# Allegro board XS6.brd
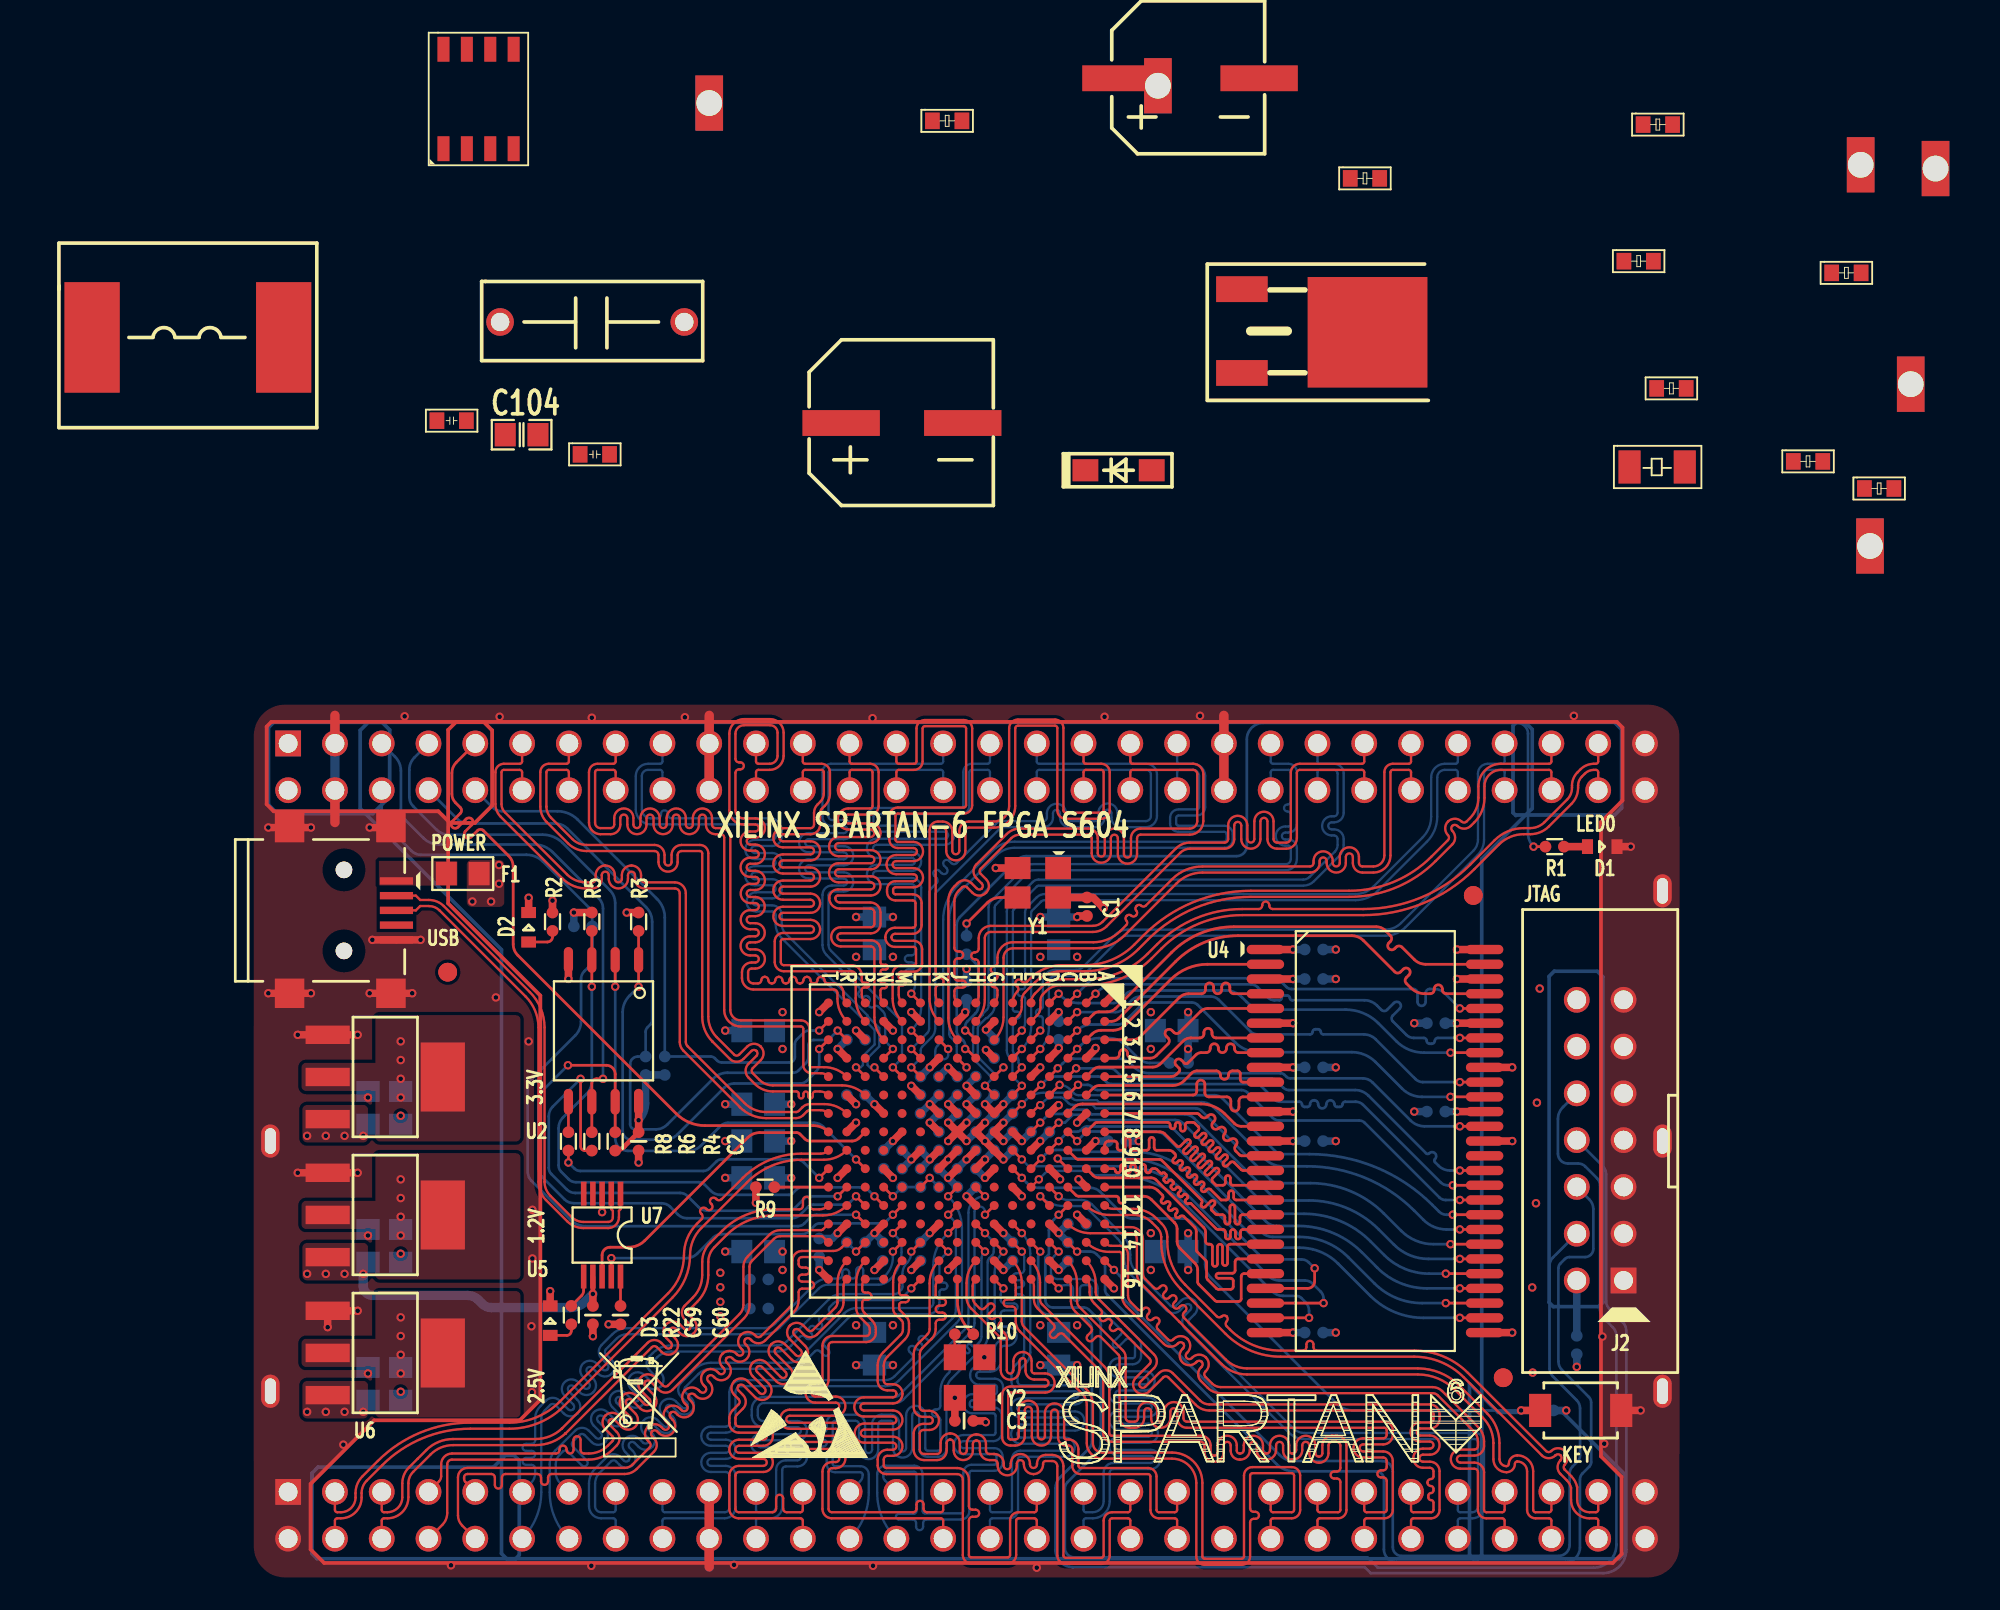
[diagram p0: board, top side]
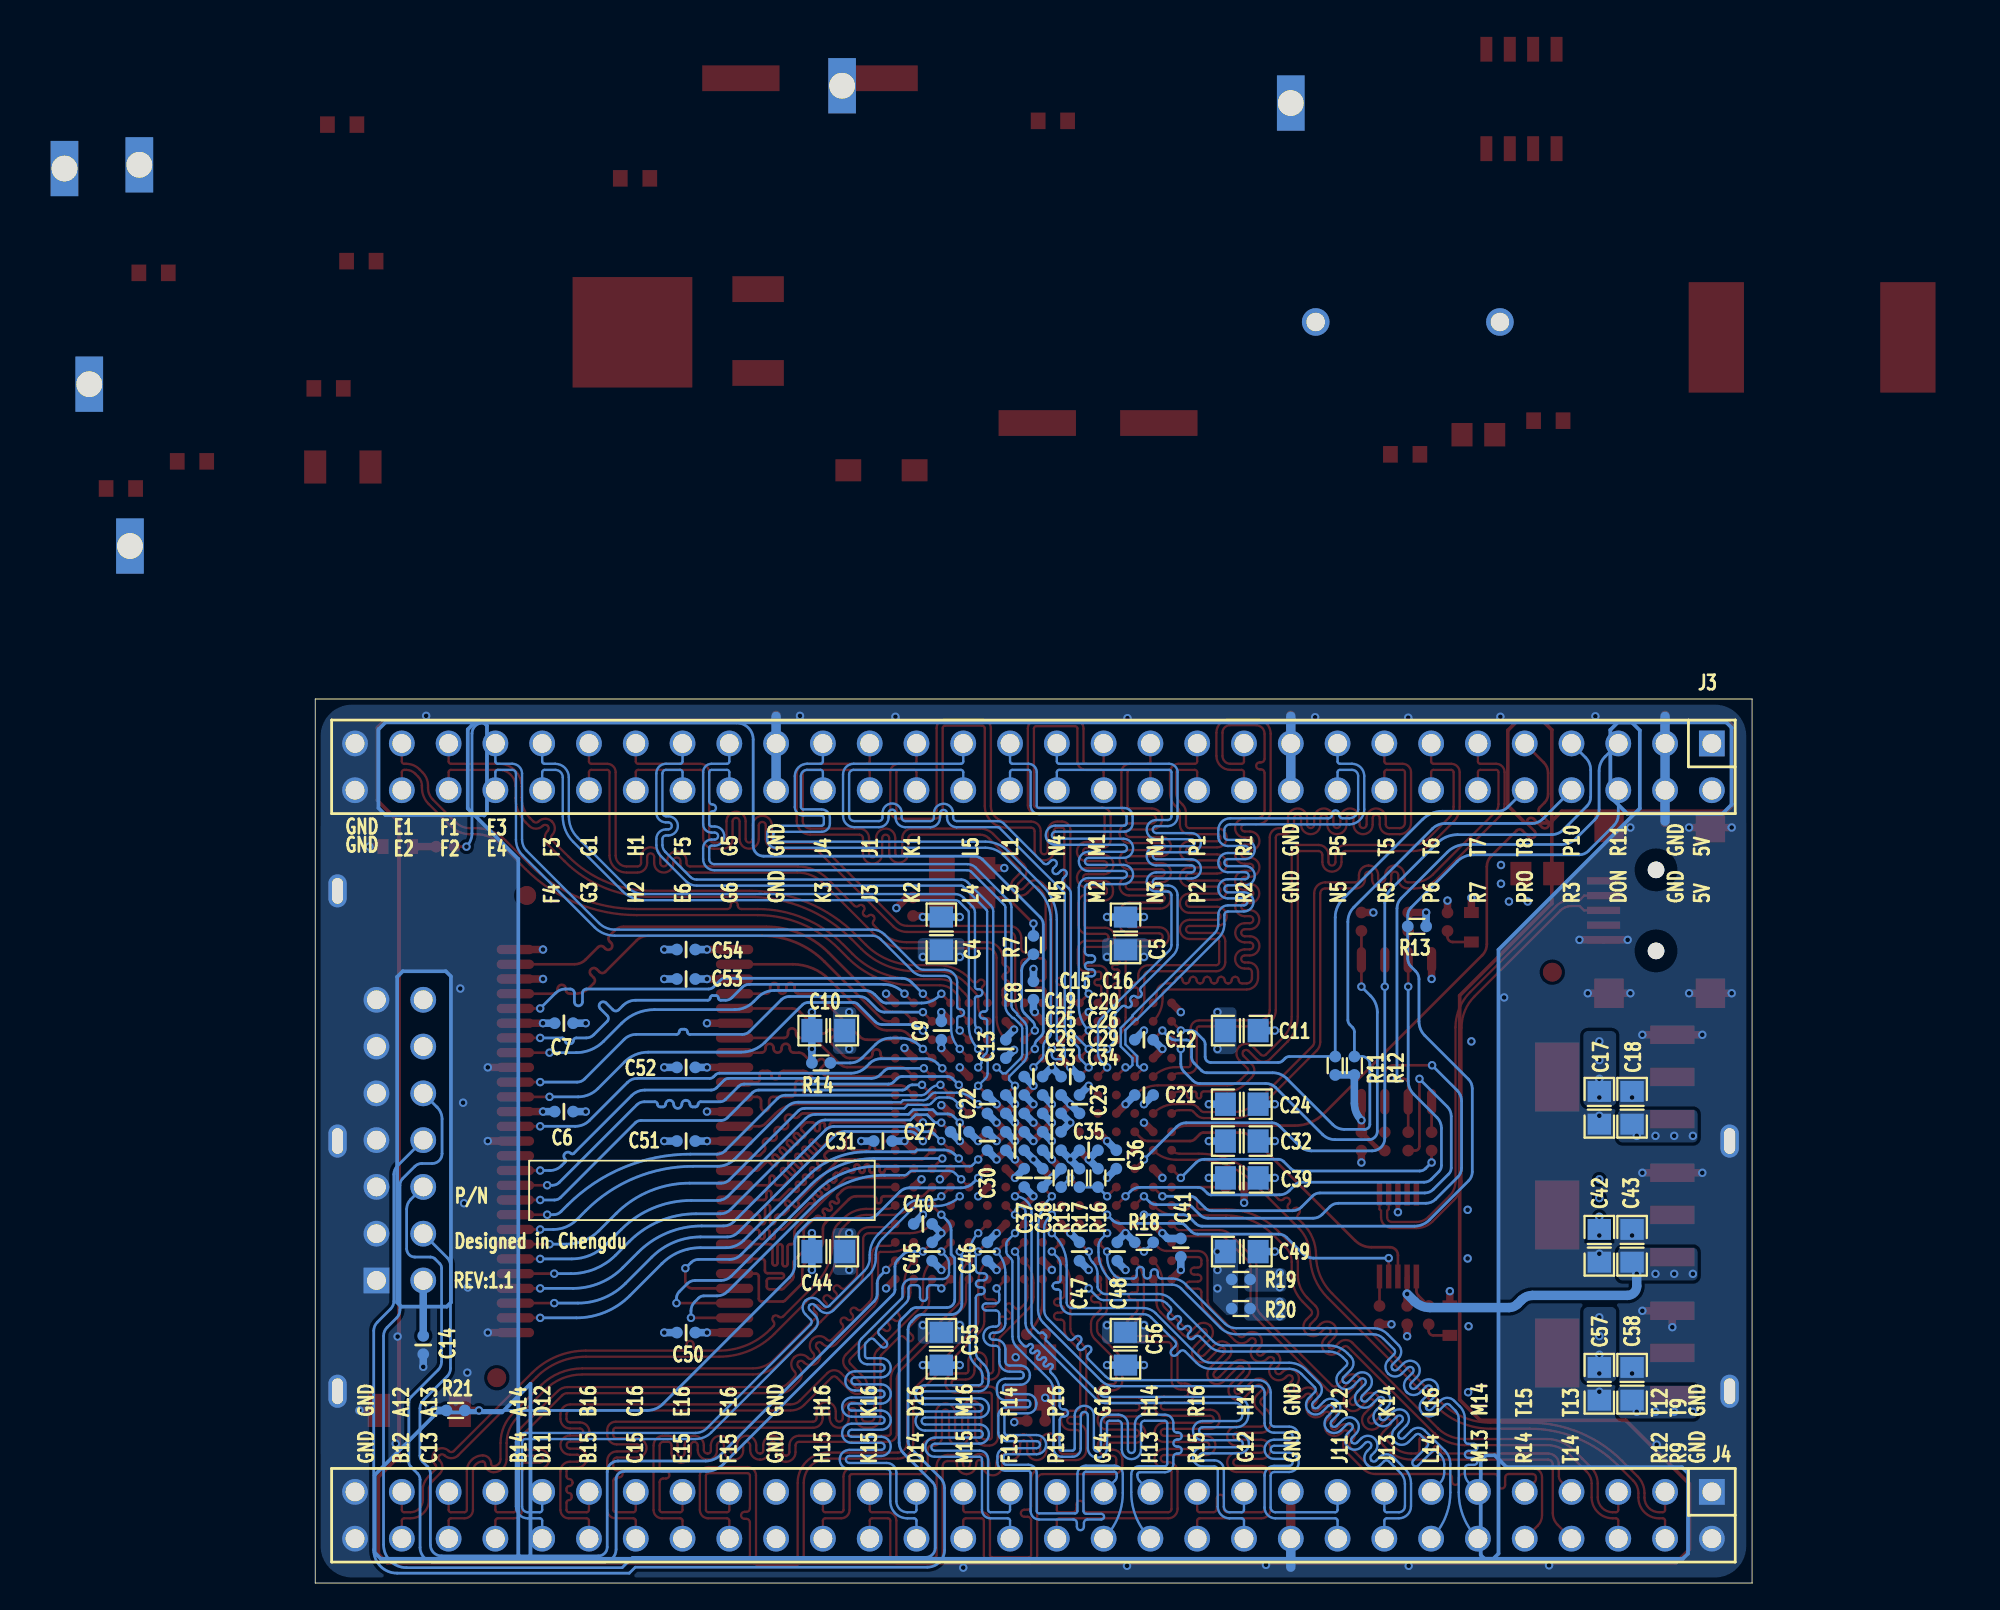
[diagram p1: board, bottom side, seen from below]

No outline. copper layers: TOP, L2_GND, L3_P, BOTTOM. Coordinates in mm from the lowest, leftmost part position.

## Design rules (mm)
constraint set DEFAULT: min track width 0.147, pair gap 0.102
net group DP_USB: nets USB_DM USB_DP
net group NG_SDRAM_D8-15: nets SDRAM_DQ8 SDRAM_DQ9 SDRAM_DQ10 SDRAM_DQ11 SDRAM_DQ12 SDRAM_DQ13 SDRAM_DQ14 SDRAM_DQ15 SDRAM_UDQM

## Placement (name value [footprint] x y rotation side)
C1  100nF  [C0402]  54.01 31.77 270 top
C2  100nF  [C0402]  29.67 19.03 270 top
C3  100nF  [C0402]  47.34 3.86 0 top
C4  10uF  [C0805]  52.47 30.33 90 bottom
C5  10uF  [C0805]  42.47 30.33 90 bottom
C6  100nF  [C0402]  72.96 20.65 180 bottom
C7  100nF  [C0402]  72.96 25.45 180 bottom
C8  100nF  [C0402]  47.47 27.22 90 bottom
C9  100nF  [C0402]  52.47 25.05 270 bottom
C10  10uF  [C0805]  58.61 25.05 0 bottom
C11  10uF  [C0805]  36.16 25.05 180 bottom
C12  100nF  [C0402]  41.47 24.55 0 bottom
C13  100nF  [C0402]  48.97 24.05 90 bottom
C14  100nF  [C0402]  80.6 7.98 270 bottom
C15  100nF  [C0402]  47.47 22.55 180 bottom
C16  100nF  [C0402]  45.47 22.55 0 bottom
C17  22uF/6.3V  [C0805]  16.75 20.86 270 bottom
C18  10uF/10V  [C0805]  14.97 20.86 90 bottom
C19  100nF  [C0402]  48.47 21.55 180 bottom
C20  100nF  [C0402]  46.47 21.55 180 bottom
C21  100nF  [C0402]  41.47 21.55 180 bottom
C22  100nF  [C0402]  49.97 21.05 270 bottom
C23  100nF  [C0402]  44.97 21.05 270 bottom
C24  10uF  [C0805]  36.16 21.05 180 bottom
C25  100nF  [C0402]  48.47 20.55 180 bottom
C26  100nF  [C0402]  46.47 20.55 0 bottom
C27  100nF  [C0402]  51.47 19.55 0 bottom
C28  100nF  [C0402]  48.47 19.55 180 bottom
C29  100nF  [C0402]  46.47 19.55 0 bottom
C30  100nF  [C0402]  49.97 19.05 90 bottom
C31  100nF  [C0402]  55.65 19.05 0 bottom
C32  10uF  [C0805]  36.16 19.05 180 bottom
C33  100nF  [C0402]  48.47 18.55 180 bottom
C34  100nF  [C0402]  46.47 18.55 180 bottom
C35  100nF  [C0402]  44.47 18.55 0 bottom
C36  100nF  [C0402]  42.97 18.05 90 bottom
C37  100nF  [C0402]  47.97 17.05 270 bottom
C38  100nF  [C0402]  46.97 17.05 90 bottom
C39  10uF  [C0805]  36.16 17.05 180 bottom
C40  100nF  [C0402]  53.47 14.55 180 bottom
C41  100nF  [C0402]  39.47 13.26 270 bottom
C42  22uF/6.3V  [C0805]  16.75 13.36 270 bottom
C43  10uF/10V  [C0805]  14.97 13.36 90 bottom
C44  10uF  [C0805]  58.61 13.05 0 bottom
C45  100nF  [C0402]  52.97 13.05 90 bottom
C46  100nF  [C0402]  49.97 13.05 270 bottom
C47  100nF  [C0402]  44.97 13.05 270 bottom
C48  100nF  [C0402]  42.92 13.05 90 bottom
C49  10uF  [C0805]  36.16 13.05 180 bottom
C50  100nF  [C0402]  66.33 8.65 0 bottom
C51  100nF  [C0402]  66.33 19.05 0 bottom
C52  100nF  [C0402]  66.33 23.05 0 bottom
C53  100nF  [C0402]  66.33 27.85 0 bottom
C54  100nF  [C0402]  66.33 29.45 0 bottom
C55  10uF  [C0805]  52.47 7.77 270 bottom
C56  10uF  [C0805]  42.48 7.77 270 bottom
C57  22uF/6.3V  [C0805]  16.75 5.87 270 bottom
C58  10uF/10V  [C0805]  14.97 5.87 90 bottom
C59  100nF  [C0402]  27.19 9.6 270 top
C60  100nF  [C0402]  28.69 9.6 270 top
C102  0.1uF/35V  [C0603]  18.72 58.17 0 top
C103  220uF/35V  [CAP-SMD-D8D0-L8D3-W8D3-P7D5]  55.85 76.76 0 top
C104  10uF/35V  [C0805]  23.32 57.4 0 top
C205  0.1uF/35V  [C0603]  26.49 56.34 0 top
C401  4.7uF/400V  [CAP-SMD-D8D0-L10D3-B8D3]  40.67 58.04 0 top
C602  0.1uF/400V  [CAP-THR-L11D4-W3D8-P10D0-D0D8]  22.15 63.53 0 top
D1  GREEN  [Q0603]  81.98 35.04 0 top
D2  GREEN  [Q0603]  23.7 30.66 90 top
D3  GREEN  [Q0603]  24.87 9.3 90 top
D201  E1G  [SOD-123FL]  53.92 55.47 0 top
F1  400mA  [F0805]  20.12 33.57 0 top
J1  MINI USB  [MINIUSB-AB-SM]  7.77 31.57 270 top
J2  CONN RCPT 7x2  [DIP2X7_2P54]  83.14 11.48 90 top
J3  CONN PLUG 30x2  [DIP2X30_2P54]  10.64 40.64 0 bottom
J4  CONN PLUG 30x2  [DIP2X30_2P54]  10.64 0 0 bottom
L101  100uH/2A  [IND-SMD-L11D5-W10D0-P10D4]  0 62.69 0 top
NOREF  -  []  44.07 53.54 90 top
NOREF#2  -  [unnamed#2]  19.3 28.22 0 top
NOREF#3  -  []  62.42 60.76 90 top
NOREF#4  -  []  55.35 74.91 0 top
NOREF#5  -  []  40.67 58.04 0 top
NOREF#6  -  []  62.42 65.31 0 top
NOREF#7  -  []  84.99 54.5 90 top
NOREF#8  -  []  82.61 55.65 0 top
NOREF#9  -  []  53.92 55.47 0 top
NOREF#10  -  []  38.97 56.34 0 top
NOREF#11  -  [unnamed#2]  76.61 6.2 0 top
NOREF#12  -  []  84.3 0 90 top
NOREF#13  -  []  55.85 76.76 0 top
NOREF#14  -  []  60.95 72.66 90 top
NOREF#15  -  []  83.46 55.65 0 top
NOREF#16  -  [unnamed#2]  74.98 32.39 0 top
NOREF#17  -  []  138.82 48.31 180 bottom
Q201  AOD458  [TO-252-2-DPAK]  69.24 62.97 0 top
R1  1K  [R0402]  79.4 35.04 180 top
R2  680R  [R0402]  24.99 30.96 270 top
R3  2.4K  [R0402]  29.67 30.96 90 top
R4  4.7K  [R0402]  28.4 19.03 270 top
R5  4.7K  [R0402]  27.13 30.96 90 top
R6  33R  [R0402]  27.13 19.03 90 top
R7  33R  [R0402]  47.47 29.69 90 bottom
R8  33R  [R0402]  25.86 19.03 90 top
R9  1K  [R0402]  36.54 16.55 180 top
R10  33R  [R0402]  47.34 8.56 180 top
R11  4.7K  [R0402]  31.09 23.14 270 bottom
R12  4.7K  [R0402]  30.05 23.14 270 bottom
R13  330R  [R0402]  26.65 30.71 180 bottom
R14  100R  [R0402]  59 23.29 0 bottom
R15  4.7K  [R0402]  45.97 17.05 90 bottom
R16  1K/NC  [R0402]  43.97 17.05 90 bottom
R17  1K  [R0402]  44.97 17.05 270 bottom
R18  4.7K  [R0402]  41.47 13.55 180 bottom
R19  0R/NC  [R0402]  36.21 11.54 180 bottom
R20  0R  [R0402]  36.21 9.96 180 bottom
R21  1K  [R0402]  78.84 4.42 180 bottom
R22  680R  [R0402]  26.01 9.6 270 top
R105  50mR  [R1206]  83.46 55.65 0 top
R108  DNP  [R0603]  84.94 59.92 0 top
R204  0  [R0603]  83.16 66.83 0 top
R206  DNP  [R0603]  68.3 71.32 0 top
R207  0  [R0603]  84.2 74.24 0 top
R209  DNP  [R0603]  94.44 66.19 0 top
R302  DNP  [R0603]  45.62 74.45 0 top
R303  10K  [R0603]  92.35 55.96 0 top
R305  1.5M  [R0603]  96.22 54.48 0 top
S1  FSMRA2JH  [SMD_3X4X2MM]  80.81 4.42 0 top
T1  TPAD_015  [TP_OBL1_4X0_6]  85.25 32.64 90 top
T2  TPAD_015  [TP_OBL1_4X0_6]  9.68 19.05 90 top
T3  TPAD_015  [TP_OBL1_4X0_6]  85.25 19.05 90 top
T4  TPAD_015  [TP_OBL1_4X0_6]  9.68 5.46 90 top
T5  TPAD_015  [TP_OBL1_4X0_6]  85.25 5.46 90 top
TP1  T POINT F  [STAMP_HOLE_1D5X3D0_1D4]  57.86 76.35 0 top
TP2  T POINT F  [STAMP_HOLE_1D5X3D0_1D4]  33.5 75.41 0 top
TP3  T POINT F  [STAMP_HOLE_1D5X3D0_1D4]  98.73 60.15 0 top
TP4  T POINT F  [STAMP_HOLE_1D5X3D0_1D4]  96.52 51.36 0 top
TP5  T POINT F  [STAMP_HOLE_1D5X3D0_1D4]  96.01 72.06 0 top
TP6  T POINT F  [STAMP_HOLE_1D5X3D0_1D4]  100.08 71.86 0 top
U1  W25Q16FVSIG  [SOIC8_1P27_208MIL]  27.76 25.03 270 top
U2  AMS1117-3.3  [SOT-223]  15.91 22.53 270 top
U3  xc6slx25ftg256  [FTG256]  47.47 19.05 270 top
U4  W9812G6KH-6  [TSOP54-400]  63.7 29.45 270 top
U5  AMS1117-1.2  [SOT-223]  15.91 15.04 270 top
U6  AMS1117-2.5  [SOT-223]  15.91 7.54 270 top
U7  CH340E  [MSOP10]  27.69 13.94 270 top
U101  MAX1771ESA+  [SO-8]  19.08 78.33 0 top
Y1  50MHz  [OSC3225]  51.34 33.07 180 top
Y2  TBD  [OSC3225]  47.64 6.21 90 top

## Library data of the parts
C1 C3 = CAP_0: room: PHY&FPGA
C2 C4-C60 = CAP_NP
C102 C104 C205 = CAP NP
C103 C401 C602 = C
D1-D3 = LED: room: POWER
D201 = DIODE
F1 = FUSE
J1 = USB_MINI_AB_RECEPTACLE: Tolerance: #TOL; User Part Number: HAMP
J2 = CONN RCPT 7x2/SM_1
J3 J4 = CONN PLUG 30x2
L101 = INDUCTOR
Q201 = IRF644PbF
R1-R22 = SMALL R1
R105 R108 R204 R206 R207 R209 R302 R303 R305 = R
S1 = SWITCH_2: User Part Number: partnum; Tolerance: RichardLC; room: CPU
T1-T5 = TESTLOOP
TP1-TP6 = T POINT F
U1 = EPCS1SI8N_0
U2 U5 U6 = AMS1117
U3 = xc6slx25ftg256
U4 = K4S561632C-TC75_0
U7 = CH340E
U101 = MAX1771ESA+
Y1 Y2 = OSCILLATOR_0: room: PHY&FPGA

## Footprints (pads in the part's own frame, mm; a bottom-side part is the same pattern mirrored in y, then rotated)
C0402
  round 0.635 smd: 1(-0.5,0) 2(0.5,0)
C0603
  rect 0.8x0.9 smd: 1(0,0) 2(1.6,0)
C0805
  rect 1.14x1.27 smd: 1(-0.889,0) 2(0.889,0)
CAP-SMD-D8D0-L8D3-W8D3-P7D5
  rect 4.2x1.4 smd: 1(0,0) 2(7.5,0)
CAP-SMD-D8D0-L10D3-B8D3
  rect 4.2x1.4 smd: 1(0,0) 2(6.6,0)
CAP-THR-L11D4-W3D8-P10D0-D0D8
  round 1.5 hole 1: 1(0,0) 2(10,0)
DIP2X7_2P54
  rect 1.4x1.4 hole 1.021: 1(0,0)
  round 1.4 hole 1.021: 2(0,2.54) 3(2.54,0) 4(2.54,2.54) 5(5.08,0) 6(5.08,2.54) 7(7.62,0) 8(7.62,2.54) 9(10.16,0) 10(10.16,2.54) 11(12.7,0) 12(12.7,2.54) 13(15.24,0) 14(15.24,2.54)
DIP2X30_2P54
  rect 1.4x1.4 hole 1.021: 1(0,0)
  round 1.4 hole 1.021: 2(0,2.54) 3(2.54,0) 4(2.54,2.54) 5(5.08,0) 6(5.08,2.54) 7(7.62,0) 8(7.62,2.54) 9(10.16,0) 10(10.16,2.54) 11(12.7,0) 12(12.7,2.54) 13(15.24,0) 14(15.24,2.54) 15(17.78,0) 16(17.78,2.54) 17(20.32,0) 18(20.32,2.54) 19(22.86,0) 20(22.86,2.54) 21(25.4,0) 22(25.4,2.54) 23(27.94,0) 24(27.94,2.54) 25(30.48,0) 26(30.48,2.54) 27(33.02,0) 28(33.02,2.54) 29(35.56,0) 30(35.56,2.54) 31(38.1,0) 32(38.1,2.54) 33(40.64,0) 34(40.64,2.54) 35(43.18,0) 36(43.18,2.54) 37(45.72,0) 38(45.72,2.54) 39(48.26,0) 40(48.26,2.54) 41(50.8,0) 42(50.8,2.54) 43(53.34,0) 44(53.34,2.54) 45(55.88,0) 46(55.88,2.54) 47(58.42,0) 48(58.42,2.54) 49(60.96,0) 50(60.96,2.54) 51(63.5,0) 52(63.5,2.54) 53(66.04,0) 54(66.04,2.54) 55(68.58,0) 56(68.58,2.54) 57(71.12,0) 58(71.12,2.54) 59(73.66,0) 60(73.66,2.54)
F0805
  rect 1.14x1.27 smd: 1(-0.889,0) 2(0.889,0)
FTG256
  round 0.483 smd: A1(-7.5,7.5) A2(-6.5,7.5) A3(-5.5,7.5) A4(-4.5,7.5) A5(-3.5,7.5) A6(-2.5,7.5) A7(-1.5,7.5) A8(-0.5,7.5) A9(0.5,7.5) A10(1.5,7.5) A11(2.5,7.5) A12(3.5,7.5) A13(4.5,7.5) A14(5.5,7.5) A15(6.5,7.5) A16(7.5,7.5) B1(-7.5,6.5) B2(-6.5,6.5) B3(-5.5,6.5) B4(-4.5,6.5) B5(-3.5,6.5) B6(-2.5,6.5) B7(-1.5,6.5) B8(-0.5,6.5) B9(0.5,6.5) B10(1.5,6.5) B11(2.5,6.5) B12(3.5,6.5) B13(4.5,6.5) B14(5.5,6.5) B15(6.5,6.5) B16(7.5,6.5) C1(-7.5,5.5) C2(-6.5,5.5) C3(-5.5,5.5) C4(-4.5,5.5) C5(-3.5,5.5) C6(-2.5,5.5) C7(-1.5,5.5) C8(-0.5,5.5) C9(0.5,5.5) C10(1.5,5.5) C11(2.5,5.5) C12(3.5,5.5) C13(4.5,5.5) C14(5.5,5.5) C15(6.5,5.5) C16(7.5,5.5) D1(-7.5,4.5) D2(-6.5,4.5) D3(-5.5,4.5) D4(-4.5,4.5) D5(-3.5,4.5) D6(-2.5,4.5) D7(-1.5,4.5) D8(-0.5,4.5) D9(0.5,4.5) D10(1.5,4.5) D11(2.5,4.5) D12(3.5,4.5) D13(4.5,4.5) D14(5.5,4.5) D15(6.5,4.5) D16(7.5,4.5) E1(-7.5,3.5) E2(-6.5,3.5) E3(-5.5,3.5) E4(-4.5,3.5) E5(-3.5,3.5) E6(-2.5,3.5) E7(-1.5,3.5) E8(-0.5,3.5) E9(0.5,3.5) E10(1.5,3.5) E11(2.5,3.5) E12(3.5,3.5) E13(4.5,3.5) E14(5.5,3.5) E15(6.5,3.5) E16(7.5,3.5) F1(-7.5,2.5) F2(-6.5,2.5) F3(-5.5,2.5) F4(-4.5,2.5) F5(-3.5,2.5) F6(-2.5,2.5) F7(-1.5,2.5) F8(-0.5,2.5) F9(0.5,2.5) F10(1.5,2.5) F11(2.5,2.5) F12(3.5,2.5) F13(4.5,2.5) F14(5.5,2.5) F15(6.5,2.5) F16(7.5,2.5) G1(-7.5,1.5) G2(-6.5,1.5) G3(-5.5,1.5) G4(-4.5,1.5) G5(-3.5,1.5) G6(-2.5,1.5) G7(-1.5,1.5) G8(-0.5,1.5) G9(0.5,1.5) G10(1.5,1.5) G11(2.5,1.5) G12(3.5,1.5) G13(4.5,1.5) G14(5.5,1.5) G15(6.5,1.5) G16(7.5,1.5) H1(-7.5,0.5) H2(-6.5,0.5) H3(-5.5,0.5) H4(-4.5,0.5) H5(-3.5,0.5) H6(-2.5,0.5) H7(-1.5,0.5) H8(-0.5,0.5) H9(0.5,0.5) H10(1.5,0.5) H11(2.5,0.5) H12(3.5,0.5) H13(4.5,0.5) H14(5.5,0.5) H15(6.5,0.5) H16(7.5,0.5) J1(-7.5,-0.5) J2(-6.5,-0.5) J3(-5.5,-0.5) J4(-4.5,-0.5) J5(-3.5,-0.5) J6(-2.5,-0.5) J7(-1.5,-0.5) J8(-0.5,-0.5) J9(0.5,-0.5) J10(1.5,-0.5) J11(2.5,-0.5) J12(3.5,-0.5) J13(4.5,-0.5) J14(5.5,-0.5) J15(6.5,-0.5) J16(7.5,-0.5) K1(-7.5,-1.5) K2(-6.5,-1.5) K3(-5.5,-1.5) K4(-4.5,-1.5) K5(-3.5,-1.5) K6(-2.5,-1.5) K7(-1.5,-1.5) K8(-0.5,-1.5) K9(0.5,-1.5) K10(1.5,-1.5) K11(2.5,-1.5) K12(3.5,-1.5) K13(4.5,-1.5) K14(5.5,-1.5) K15(6.5,-1.5) K16(7.5,-1.5) L1(-7.5,-2.5) L2(-6.5,-2.5) L3(-5.5,-2.5) L4(-4.5,-2.5) L5(-3.5,-2.5) L6(-2.5,-2.5) L7(-1.5,-2.5) L8(-0.5,-2.5) L9(0.5,-2.5) L10(1.5,-2.5) L11(2.5,-2.5) L12(3.5,-2.5) L13(4.5,-2.5) L14(5.5,-2.5) L15(6.5,-2.5) L16(7.5,-2.5) M1(-7.5,-3.5) M2(-6.5,-3.5) M3(-5.5,-3.5) M4(-4.5,-3.5) M5(-3.5,-3.5) M6(-2.5,-3.5) M7(-1.5,-3.5) M8(-0.5,-3.5) M9(0.5,-3.5) M10(1.5,-3.5) M11(2.5,-3.5) M12(3.5,-3.5) M13(4.5,-3.5) M14(5.5,-3.5) M15(6.5,-3.5) M16(7.5,-3.5) N1(-7.5,-4.5) N2(-6.5,-4.5) N3(-5.5,-4.5) N4(-4.5,-4.5) N5(-3.5,-4.5) N6(-2.5,-4.5) N7(-1.5,-4.5) N8(-0.5,-4.5) N9(0.5,-4.5) N10(1.5,-4.5) N11(2.5,-4.5) N12(3.5,-4.5) N13(4.5,-4.5) N14(5.5,-4.5) N15(6.5,-4.5) N16(7.5,-4.5) P1(-7.5,-5.5) P2(-6.5,-5.5) P3(-5.5,-5.5) P4(-4.5,-5.5) P5(-3.5,-5.5) P6(-2.5,-5.5) P7(-1.5,-5.5) P8(-0.5,-5.5) P9(0.5,-5.5) P10(1.5,-5.5) P11(2.5,-5.5) P12(3.5,-5.5) P13(4.5,-5.5) P14(5.5,-5.5) P15(6.5,-5.5) P16(7.5,-5.5) R1(-7.5,-6.5) R2(-6.5,-6.5) R3(-5.5,-6.5) R4(-4.5,-6.5) R5(-3.5,-6.5) R6(-2.5,-6.5) R7(-1.5,-6.5) R8(-0.5,-6.5) R9(0.5,-6.5) R10(1.5,-6.5) R11(2.5,-6.5) R12(3.5,-6.5) R13(4.5,-6.5) R14(5.5,-6.5) R15(6.5,-6.5) R16(7.5,-6.5) T1(-7.5,-7.5) T2(-6.5,-7.5) T3(-5.5,-7.5) T4(-4.5,-7.5) T5(-3.5,-7.5) T6(-2.5,-7.5) T7(-1.5,-7.5) T8(-0.5,-7.5) T9(0.5,-7.5) T10(1.5,-7.5) T11(2.5,-7.5) T12(3.5,-7.5) T13(4.5,-7.5) T14(5.5,-7.5) T15(6.5,-7.5) T16(7.5,-7.5)
IND-SMD-L11D5-W10D0-P10D4
  rect 3x6 smd: 1(0,0) 2(10.4,0)
MINIUSB-AB-SM
  round 0.9 hole 0.9 unplated: (-2.2,5.9) (2.2,5.9)
  rect 0.4x1.8 smd: 1(-1.6,8.75) 2(-0.8,8.75) 3(0,8.75) 4(0.8,8.75) 5(1.6,8.75)
  rect 1.6x1.6 smd: S1(-4.5,8.45) S2(4.5,8.45) S3(-4.5,2.95) S4(4.5,2.95)
MSOP10
  rect 1.3x0.3 smd: 1(-2.25,1) 2(-2.25,0.5) 3(-2.25,0) 4(-2.25,-0.5) 5(-2.25,-1) 6(2.25,-1) 7(2.25,-0.5) 8(2.25,0) 9(2.25,0.5) 10(2.25,1)
OSC3225
  rect 1.4x1.2 smd: 1(-1.1,-0.8) 2(1.1,-0.8) 3(1.1,0.8) 4(-1.1,0.8)
Q0603
  rect 0.6x0.8 smd: 1(-0.8,0) 2(0.8,0)
R0402
  round 0.635 smd: 1(-0.5,0) 2(0.5,0)
R0603
  rect 0.8x0.9 smd: 1(0,0) 2(1.6,0)
R1206
  rect 1.2x1.8 smd: 1(0,0) 2(3,0)
SMD_3X4X2MM
  rect 1.2x1.8 smd: 1(-2.2,0) 2(2.2,0)
SO-8
  rect 0.65x1.35 smd: 1(0,-5.4) 2(1.27,-5.4) 3(2.54,-5.4) 4(3.81,-5.4) 5(3.81,0) 6(2.54,0) 7(1.27,0) 8(0,0)
SOD-123FL
  rect 1.4x1.2 smd: 1(0,0) 2(3.6,0)
SOIC8_1P27_208MIL
  oval 1.4x0.5 smd: 1(-3.85,1.905) 2(-3.85,0.635) 3(-3.85,-0.635) 4(-3.85,-1.905) 5(3.85,-1.905) 6(3.85,-0.635) 7(3.85,0.635) 8(3.85,1.905)
SOT-223
  rect 1x2.4 smd: 1(-2.29,-3.125) 2(0,-3.125) 3(2.29,-3.125)
  rect 3.75x2.4 smd: 4(0,3.125)
STAMP_HOLE_1D5X3D0_1D4
  rect 1.5x3 hole 1.4: 1(0,0)
TO-252-2-DPAK
  rect 2.8x1.4 smd: 1(-6.82,2.34) 3(-6.82,-2.21)
  rect 6.5x6 smd: 2(0,0)
TP_OBL1_4X0_6
  oval 1.8x1 hole 1.4x0.6: 1(0,0)
TSOP54-400
  oval 0.508x2.032 smd: 1(0,0) 2(0.8,0) 3(1.6,0) 4(2.4,0) 5(3.2,0) 6(4,0) 7(4.8,0) 8(5.6,0) 9(6.4,0) 10(7.2,0) 11(8,0) 12(8.8,0) 13(9.6,0) 14(10.4,0) 15(11.2,0) 16(12,0) 17(12.8,0) 18(13.6,0) 19(14.4,0) 20(15.2,0) 21(16,0) 22(16.8,0) 23(17.6,0) 24(18.4,0) 25(19.2,0) 26(20,0) 27(20.8,0) 28(20.8,11.9) 29(20,11.9) 30(19.2,11.9) 31(18.4,11.9) 32(17.6,11.9) 33(16.8,11.9) 34(16,11.9) 35(15.2,11.9) 36(14.4,11.9) 37(13.6,11.9) 38(12.8,11.9) 39(12,11.9) 40(11.2,11.9) 41(10.4,11.9) 42(9.6,11.9) 43(8.8,11.9) 44(8,11.9) 45(7.2,11.9) 46(6.4,11.9) 47(5.6,11.9) 48(4.8,11.9) 49(4,11.9) 50(3.2,11.9) 51(2.4,11.9) 52(1.6,11.9) 53(0.8,11.9) 54(0,11.9)
unnamed#2
  round 1.016 smd: (0,0) (0,0)

## Nets
+1.2V: C19.1 C20.1 C22.1 C24.1 C25.1 C26.1 C28.1 C29.1 C30.1 C32.1 C33.1 C34.1 C39.1 C42.1 U3.G7 U3.G9 U3.H8 U3.H10 U3.J7 U3.J9 U3.K8(VCCINT#K8) U3.K10 U5.2 U5.4(VOUT1)
+2.5V: C57.1 R19.2 U6.2 U6.4(VOUT1)
+3.3V: C1.1 C2.1 C4.1 C5.1 C6.1 C7.1 C8.1 C9.1 C10.1 C11.1 C12.1 C13.1 C14.1 C15.1 C16.1 C17.1 C21.1 C23.1 C27.1 C31.1 C35.1 C36.1 C37.1 C38.1 C40.1 C44.1 C50.1 C51.1 C52.1 C53.1 C54.1 J2.2(VREF) R3.2 R4.2 R5.2 R9.2 R11.2 R12.2 R13.2 R15.2 R16.2 R20.2 R21.1 U1.8 U2.2 U2.4(VOUT1) U3.B4 U3.B9 U3.B13 U3.D2 U3.D7 U3.D10 U3.E5 U3.F8 U3.F11 U3.G4 U3.G10 U3.H6 U3.J2 U3.J10 U3.K4 U3.L6 U3.L9 U3.N2 U3.N7 U3.N10 U3.R4 U3.R8 U4.1 U4.3 U4.9 U4.14 U4.27 U4.43 U4.49 Y1.4(VCC)
+5V: C18.1 C43.1 C58.1 C59.1 F1.2 J3.1 J3.2 R2.1 U2.3 U5.3 U6.3 U7.7(VCC)
GND: C1.2 C2.2 C3.2 C4.2 C5.2 C6.2 C7.2 C8.2 C9.2 C10.2 C11.2 C12.2 C13.2 C14.2 C15.2 C16.2 C17.2 C18.2 C19.2 C20.2 C21.2 C22.2 C23.2 C24.2 C25.2 C26.2 C27.2 C28.2 C29.2 C30.2 C31.2 C32.2 C33.2 C34.2 C35.2 C36.2 C37.2 C38.2 C39.2 C40.2 C41.2 C42.2 C43.2 C44.2 C45.2 C46.2 C47.2 C48.2 C49.2 C50.2 C51.2 C52.2 C53.2 C54.2 C55.2 C56.2 C57.2 C58.2 C59.2 C60.2 C102.2 C103.2 C104.2 C205.2 C401.2 D1.2(CATHODE) D2.2(CATHODE) D3.2(CATHODE) J1.5 J1.S1 J1.S2 J1.S3 J1.S4(SHLD4) J2.1 J2.3 J2.5 J2.7 J2.9 J2.11 J2.13 J3.3 J3.4 J3.19 J3.20 J3.41 J3.42 J3.59 J3.60 J4.1 J4.2 J4.19 J4.20 J4.41 J4.42 J4.59 J4.60 R14.2 R17.1 R18.1 R105.2 R207.1 R302.2 R303.2 S1.2 T1.1(PIN1) T2.1(PIN1) T3.1(PIN1) T4.1(PIN1) T5.1(PIN1) TP1.1(TP) TP4.1(TP) U1.4 U2.1 U3.A1 U3.A16 U3.B7 U3.B11 U3.D4 U3.D13 U3.E9 U3.G2 U3.G8 U3.G15 U3.H7 U3.H9 U3.H12 U3.J5 U3.J8 U3.K7 U3.K9 U3.L2 U3.L15 U3.M8 U3.N13 U3.P3 U3.R6 U3.R10 U3.T1 U3.T16 U4.6 U4.12 U4.28 U4.41 U4.46 U4.52(VSSQ3) U4.54 U5.1 U6.1 U7.3 U101.6 U101.7 Y1.2 Y2.2
VCCIO: C3.1 C41.1 C45.1 C46.1 C47.1 C48.1 C49.1 C55.1 C56.1 R19.1 R20.1 U3.D15 U3.G13 U3.J15 U3.K13 U3.N15 U3.R13 Y2.4(VCC)
A12_L62N_0: J4.57 U3.A12
A13_L63N_0: J4.55 U3.A13
A14_L65N_0: J4.53 U3.A14
B12_L62P_0: J4.58 U3.B12
B14_L65P_0: J4.54 U3.B14
B15_L29P_1: J4.50 U3.B15
B16_L29N_1: J4.49 U3.B16
C13_L63P_0: J4.56 U3.C13
C15_L33P_1: J4.48 U3.C15
C16_L33N_1: J4.47 U3.C16
D11_L66P_0: J4.52 U3.D11
D12_L66N_0: J4.51 U3.D12
D14_L31P_1: J4.36 U3.D14
D16_L31N_1: J4.35 U3.D16
DONE_2: J3.6 R13.1 U3.P13
E1_L46N_3: J3.57 U3.E1
E2_L46P_3: J3.58 U3.E2
E3_L54N_3: J3.53 U3.E3
E4_L54P_3: J3.54 U3.E4
E15_L34P_1: J4.46 U3.E15
E16_L34N_1: J4.45 U3.E16
EN: R209.1 TP6.1(TP)
F1_L41N_GCLK26_3: J3.55 U3.F1
F2_L41P_GCLK27_3: J3.56 U3.F2
F3_L53N_3: J3.51 U3.F3
F4_L53P_3: J3.52 U3.F4
F5_L55N_3: J3.45 U3.F5
F6_L55P_3: J3.46 U3.F6
F10_KEY_0: R21.2 S1.1 U3.F10
F13_L32P_1: J4.32 U3.F13
F14_L32N_1: J4.31 U3.F14
F15_L35P_1: J4.44 U3.F15
F16_L35N_1: J4.43 U3.F16
FPGA_TCK: J2.6 U3.C14
FPGA_TDI: J2.10 U3.C12
FPGA_TDO: J2.8 U3.E14
FPGA_TMS: J2.4 U3.A15
G1_L40N_3: J3.49 U3.G1
G3_L40P_3: J3.50 U3.G3
G5_L51N_3: J3.43 U3.G5
G6_L51P_3: J3.44 U3.G6
G12_L38P_1: J4.22 U3.G12
G14_L36P_1: J4.28 U3.G14
G16_L36N_1: J4.27 U3.G16
H1_L39N_3: J3.47 U3.H1
H2_L39P_3: J3.48 U3.H2
H3_50MHZ_CLK: R7.1 U3.H3
H4_LED_3: R1.2 U3.H4
H11_L38N_1: J4.21 U3.H11
H13_L39P_1: J4.26 U3.H13
H14_L39N_1: J4.25 U3.H14
H15_L37P_1: J4.40 U3.H15
H16_L37N_1: J4.39 U3.H16
HV+: C401.1 C602.1 D201.1(K) R305.1 TP2.1(TP)
J1_L38N_3: J3.37 U3.J1
J3_L38P_3: J3.38 U3.J3
J4_L42N_GCLK24_3: J3.39 U3.J4
J11_L40P_GCLK11_1: J4.18 U3.J11
J12_L40N_GCLK10_1: J4.17 U3.J12
J13_L41P_GCLK9_1: J4.16 U3.J13
J16_RFU_CLK: R10.1 U3.J16
K1_L37N_3: J3.35 U3.K1
K2_L37P_3: J3.36 U3.K2
K3_L42P_GCLK25_3: J3.40 U3.K3
K14_L41N_GCLK8_1: J4.15 U3.K14
K15_L44P_1: J4.38 U3.K15
K16_L44N_1: J4.37 U3.K16
L1_L36N_3: J3.31 U3.L1
L3_L36P_3: J3.32 U3.L3
L4_L45P_3: J3.34 U3.L4
L5_L45N_3: J3.33 U3.L5
L14_L47P_1: J4.14 U3.L14
L16_L47N_1: J4.13 U3.L16
M1_L35N_3: J3.27 U3.M1
M2_L35P_3: J3.28 U3.M2
M5_L2P_3: J3.30 U3.M5
M13_L74P_1: J4.12 U3.M13
M14_L74N_1: J4.11 U3.M14
M15_L46P_1: J4.34 U3.M15
M16_L46N_1: J4.33 U3.M16
MSEL0: R9.1 U3.T11
MSEL1: R16.1 R17.2 U3.N11
N1_L34N_3: J3.25 U3.N1
N3_L34P_3: J3.26 U3.N3
N4_L2N_3: J3.29 U3.N4
N5_L49P_2: J3.18 U3.N5
N12_IO_MISO2_2: R5.1 U1.3(W\P\(IO2)) U3.N12
P1_L33N_3: J3.23 U3.P1
P2_L33P_3: J3.24 U3.P2
P5_L49N_2: J3.17 U3.P5
P6_L47P_2: J3.14 U3.P6
P10_IO_DIN_MISO1_2: J3.7 U1.2 U3.P10
P12_IO_MISO3_2: R4.1 U1.7 U3.P12
P15_L48P_1: J4.30 U3.P15
P16_L48N_1: J4.29 U3.P16
PROGRAM_B_2: J3.10 R11.1 U3.T2
PWR_IC: C102.1 C104.1 R108.2 R206.1 TP5.1(TP) U101.2(V+)
PWR_IN: C103.1 L101.1 R108.1 TP3.1(TP)
R1_L32N_3: J3.21 U3.R1
R2_L32P_3: J3.22 U3.R2
R3_IO_INIT_B_2: J3.8 R12.1 U3.R3
R5_L48P_2: J3.16 U3.R5
R7_L32P_GCLK29_2: J3.12 U3.R7
R9_L23P_2: J4.4 U3.R9
R11_IO_CCLK_2: J3.5 R6.2 U1.6
R12_L52P_1: J4.6 U3.R12
R14_L50P_1: J4.10 U3.R14
R15_L49P_1: J4.24 U3.R15
R16_L49N_1: J4.23 U3.R16
RXD: U3.M12 U7.9
SDRAM_A0: U3.C11 U4.23
SDRAM_A1: U3.C10 U4.24
SDRAM_A2: U3.F9 U4.25
SDRAM_A3: U3.E11 U4.26
SDRAM_A4: U3.E10 U4.29
SDRAM_A5: U3.C8 U4.30
SDRAM_A6: U3.D9 U4.31
SDRAM_A7: U3.D8 U4.32
SDRAM_A8: U3.E8 U4.33
SDRAM_A9: U3.E7 U4.34
SDRAM_A10: U3.A11 U4.22
SDRAM_A11: U3.F7 U4.35
SDRAM_A12: U3.D6 U4.36
SDRAM_BA0: U3.A10 U4.20
SDRAM_BA1: U3.B10 U4.21
SDRAM_DQ0: U3.B3 U4.2
SDRAM_DQ1: U3.A3 U4.4
SDRAM_DQ2: U3.A4 U4.5
SDRAM_DQ3: U3.B5 U4.7
SDRAM_DQ4: U3.A5 U4.8
SDRAM_DQ5: U3.B6 U4.10
SDRAM_DQ6: U3.A6 U4.11
SDRAM_DQ7: U3.C7 U4.13
SDRAM_DQ8: U3.D5 U4.42
SDRAM_DQ9: U3.C3 U4.44
SDRAM_DQ10: U3.C2 U4.45
SDRAM_DQ11: U3.D1 U4.47
SDRAM_DQ12: U3.B1 U4.48
SDRAM_DQ13: U3.C1 U4.50
SDRAM_DQ14: U3.A2 U4.51
SDRAM_DQ15: U3.B2 U4.53
SDRAM_LDQM: U3.A7 U4.15
SDRAM_NSCAS: U3.A8 U4.17
SDRAM_NSCS: U3.C9 U4.19
SDRAM_NSRAS: U3.A9 U4.18
SDRAM_NWE: U3.B8 U4.16
SDRAM_SCKE: U3.C6 U4.37
SDRAM_SCLK: U3.E6 U4.38
SDRAM_UDQM: U3.C5 U4.39
T3_CSO_B_2: R3.1 U1.1 U3.T3
T5_L48N_2: J3.15 U3.T5
T6_L47N_2: J3.13 U3.T6
T7_L32N_GCLK28_2: J3.11 U3.T7
T8_IO_GCLK0_2: J3.9 U3.T8
T9_L23N_2: J4.3 U3.T9
T10_IO_MOSI_MISO0_2: R8.2 U1.5
T12_L52N_1: J4.5 U3.T12
T13_L51N_1: J4.7 U3.T13
T14_L51P_1: J4.8 U3.T14
T15_L50N_1: J4.9 U3.T15
TXD: U3.P8 U7.8
USB_DM: J1.2 U7.2
USB_DP: J1.3 U7.1
N00177: Q201.1 U101.1
N00181: Q201.3(S) R105.1 U101.8
N00224: D201.2 L101.2 Q201.2
N00671: C205.1 U101.5
N03183: R206.2 R207.2 R209.2 U101.4
N10874: F1.1 J1.1
N20588: R7.2 Y1.3
N92203: R10.2 Y2.3
N141459: D2.1 R2.2
N147837: R14.1 U3.C4
N151004: R8.1 U3.T10
N151270: R6.1 U3.R11
N154888: R15.1 U3.L11
N154918: R18.2 U3.P14
N155350: D1.1 R1.1
N271586: C60.1 U7.10
N273444: R22.1 U7.6
N273448: D3.1 R22.2
N281531: C602.2 R204.1 R305.2 U101.3
N361468: R204.2 R302.1 R303.1

Pads without a net: J1 4; J2 12 14; U3 D3 E12 E13 F12 G11 H5 J6 J14 K5 K6 K11 K12 L7 L8 L10 L12 L13 M3 M4 M6 M7 M9 M10 M11 N6 N8 N9 N14 N16 P4 P7 P9 P11 T4; U4 40; U7 4 5; Y1 1; Y2 1

## Via types
v1: diameter 0.457, hole 0.254, TOP to BOTTOM, 339 vias

## Routing (per net, layer and track width the routed paths; a pad name or vN(x,y) marks a point on that pad's centre or on a via; arc(x,y) is an arc through that point)
+1.2V: length 17.5
  TOP w0.406: v1(48.47,21.05) U3.G7 v1(49.47,21.05) ; U3.J9 v1(46.47,18.05) U3.K10 ; v1(48.47,20.05) U3.H8 v1(48.47,19.05) U3.G9 v1(49.47,18.05) ; v1(45.47,20.05) U3.K8 ; U3.H10 v1(48.47,18.05) ; U3.J7 v1(46.47,21.05)
  BOTTOM w0.406: C39.1 v1(37.95,17.05) ; C30.1 v1(49.47,18.05) ; C22.1 v1(49.47,21.05) ; C20.1 v1(46.47,21.05) ; C28.1 v1(48.47,19.05) ; U3.G7 v1(48.47,20.05) ; C19.1 v1(48.47,21.05) ; C32.1 v1(37.95,19.05) ; C26.1 v1(45.47,20.05) U3.K8 ; U3.J9 v1(46.47,18.05) ; C24.1 v1(37.95,21.05) ; U3.G9 v1(48.47,18.05)
  vias: v1(16.75,16.97) v1(16.75,15.95) v1(16.75,14.94) v1(16.75,13.92)
+2.5V:
  vias: v1(16.75,9.48) v1(16.75,8.46) v1(16.75,7.44) v1(16.75,6.43) v1(34.1,11.9) v1(34.1,11.11)
+3.3V: length 58.8
  TOP w0.254: C2.1 28.91,18.77 28.86,18.72 arc(28.65,18.58) R4.2
  TOP w0.406: U3.E5 v1(51.47,23.05) ; v1(47.4,26.05) 47.4,25.97 U3.J2 ; U3.N10 v1(43.47,17.05) ; U3.F8 v1(50.47,19.05) ; U4.9 v1(65.2,23.05) ; R9.2 v1(36.04,15.7) ; U4.49 v1(74.1,25.45) ; U1.8 v1(29.67,20.18) C2.1 ; U3.H6 v1(47.47,22.05) ; R3.2 v1(29.02,31.46) ; U3.B13 v1(53.47,15.05) ; U4.43 v1(74.1,20.65) ; U4.27 v1(65.2,8.65) ; U3.L9 v1(44.47,18.05) ; U3.B9 v1(54.47,19.05) ; U3.D2 v1(52.47,26.05) ; U4.3 v1(65.2,27.85) ; v1(52.47,21) 52.42,21 U3.D7 ; R5.2 v1(26.15,31.46) ; U3.G10 v1(48.47,17.05) ; U3.N2 v1(43.47,25.05) ; v1(52.55,16.97) U3.D10 ; U4.14 v1(65.2,19.05) ; U3.N7 v1(42.47,21.05) ; U3.R8 v1(41.47,20.05) ; U3.B4 54.47,24.05 v1(54.47,24.1) ; Y1.4 C1.1 54.34,32.27 v1(54.91,31.7) ; U3.F11 v1(50.47,16.05) ; U3.K4 v1(45.47,23.05) ; v1(48.52,24) U3.G4 ; U3.L6 v1(44.47,22.05) ; U3.J10 v1(46.47,17.05) ; U4.1 v1(65.2,29.45) ; U3.R4 v1(40.47,24.05)
  BOTTOM w0.406: v1(47.4,26.05) 47.47,26.13 C8.1 ; U3.G4 v1(48.52,24) ; C37.1 v1(48.47,17.05) ; R15.2 v1(46.47,17.05) C38.1 ; C51.1 v1(65.2,19.05) ; C21.1 v1(42.47,21.05) ; R11.2 R12.2 30.05,21.1 arc(29.95,20.6) v1(29.67,20.18) ; U3.L6 v1(44.47,22.05) ; C53.1 v1(65.2,27.85) ; C31.1 v1(54.47,19.05) ; R13.2 v1(26.15,31.46) ; C16.1 v1(45.47,23.05) ; R21.1 v1(80.03,4.42) ; C6.1 v1(74.1,20.65) ; C54.1 v1(65.2,29.45) ; C27.1 v1(50.47,19.05) ; U3.B13 v1(53.47,15.05) ; C7.1 v1(74.1,25.45) ; C12.1 v1(40.47,24.05) ; C15.1 v1(47.47,22.05) ; U3.N10 v1(43.47,17.05) ; R16.2 v1(44.47,18.05) C35.1 ; C52.1 v1(65.2,23.05) ; C14.1 J2.2 ; C50.1 v1(65.2,8.65) ; C9.1 v1(52.47,26.05)
  vias: v1(16.75,24.46) v1(16.75,23.45) v1(16.75,22.43) v1(16.75,21.41) v1(34.1,10.32) v1(34.1,9.53) v1(37.48,26.05) v1(37.48,24.05) v1(41.48,29.05) v1(43.48,29.05) v1(51.48,29.05) v1(53.48,29.05) v1(57.48,26.05) v1(57.48,24.05) v1(57.48,14.05) v1(57.48,12.05)
+5V: length 16.1
  TOP w0.254: U7.7 v1(27.19,10.75)
  TOP w0.406: C59.1 v1(27.19,10.75) ; R2.1 v1(24.99,32.11)
  BOTTOM w0.508: v1(27.19,10.75) 26.8,10.36 arc(26.78,10.34) 26.77,10.33 arc(26.39,10.09) 25.95,10.01 21.66,10.01 arc(21.41,10.06) 21.2,10.2 20.97,10.43 arc(20.7,10.61) 20.39,10.67 15.23,10.67 arc(14.87,10.82) 14.72,11.18 v1(14.72,11.84)
  vias: v1(11.67,19.33) v1(11.67,11.84) v1(11.67,4.35) v1(12.69,19.33) v1(12.69,11.84) v1(12.69,4.35) v1(13.7,19.33) v1(13.7,11.84) v1(13.7,4.35) v1(14.72,19.33) v1(14.72,4.35) v1(20.64,32.06) v1(21.66,32.06) v1(22.09,34.04) v1(22.09,33.02)
GND: length 139.3
  TOP w0.254: U7.3 v1(27.69,15.19)
  TOP w0.406: U3.T16 v1(39.47,12.05) ; U3.G2 v1(48.52,25.1) ; U3.H12 v1(47.47,16.05) ; U3.J8 v1(46.47,20.05) ; U3.J8 v1(47.47,20.05) ; U3.J8 v1(47.47,19.05) ; U3.J8 v1(46.47,19.05) ; v1(52.47,24.1) 52.47,24.05 U3.D4 ; U4.12 v1(65.2,20.65) ; U3.R10 v1(40.47,17.05) ; U3.H7 v1(47.47,21.05) ; v1(11.88,36.08) J1.S3 v1(9.57,36.08) ; U3.B7 v1(53.47,20.05) ; U3.K9 v1(45.47,18.05) ; v1(17.38,27.07) J1.S2 v1(15.07,27.07) ; D2.2 v1(23.7,32.26) ; U4.54 v1(74.1,29.45) ; U3.A16 v1(55.47,11.05) ; U3.K7 v1(45.47,21.05) ; v1(53.55,16.97) U3.B11 ; v1(12.79,8.94) U6.1 v1(14.42,9.83) ; U4.28 v1(77.1,8.65) ; v1(53.48,31.22) 53.54,31.27 C1.2 ; U3.P3 v1(41.47,25.05) ; U3.J5 v1(46.47,23.05) ; v1(49.47,19.05) U3.G8 v1(49.47,20.05) ; v1(11.16,17.33) U5.1 v1(14.42,17.33) ; C3.2 48.44,3.86 v1(48.51,3.78) ; v1(11.88,27.07) J1.S4 v1(9.57,27.07) ; U3.G15 v1(49.47,12.05) ; v1(14.42,24.82) U2.1 v1(11.16,24.82) ; C59.2 v1(27.19,8.45) ; v1(15.21,29.98) J1.5 v1(17.83,29.98) ; C60.2 v1(28.04,9.1) ; U3.T1 v1(39.47,26.05) ; C2.2 v1(29.67,17.88) ; S1.2 v1(84.07,4.42) ; U4.46 v1(77.1,23.05) ; U3.E9 v1(51.47,19.05) ; Y1.2 v1(49.06,33.87) ; U1.4 v1(25.86,27.85) ; U4.6 v1(65.2,25.45) ; U4.41 v1(77.1,19.05) ; D3.2 v1(24.87,10.9) ; D1.2 v1(83.53,35.04) ; U3.M8 v1(43.47,19.05) ; U3.D13 v1(52.47,14.05) ; U3.R6 v1(41.47,21.05) ; U4.52 v1(74.1,27.85) ; U3.A1 v1(55.47,27.05) ; U3.L2 v1(44.47,26.05) ; U3.N13 v1(42.47,14.05) ; J1.S1 v1(15.07,36.08) ; U3.H9 v1(47.47,18.05) ; U3.L15 v1(44.47,12.05)
  TOP w0.508: J3.42 J3.41 61.44,42.16 ; 33.5,-4.06 J4.20 J4.19 ; 33.5,42.16 J3.19 J3.20 ; J3.3 13.18,42.16 ; J3.4 13.18,36.35
  BOTTOM w0.406: v1(51.48,31.22) C4.2 v1(53.48,31.22) ; v1(16.75,12.93) C42.2 ; C35.2 v1(45.47,18.05) ; v1(45.47,18.05) R17.1 ; v1(45.47,18.05) U3.K9 ; C7.2 v1(71.78,25.45) ; C38.2 v1(47.47,18.05) U3.H9 ; C16.2 v1(46.47,23.05) U3.J5 ; v1(47.47,16.05) C37.2 ; C8.2 v1(47.47,28.4) ; C39.2 v1(34.37,17.05) ; v1(59.5,12.05) C44.2 v1(59.5,14.05) ; v1(43.48,6.88) C56.2 v1(41.48,6.88) ; U3.H7 v1(47.47,20.05) ; C23.2 v1(45.47,21.05) C20.2 ; C41.2 v1(39.47,12.05) ; U3.L15 v1(44.47,12.05) ; R18.1 v1(42.47,14.05) 42.92,13.6 C48.2 ; C27.2 v1(51.47,19.05) ; v1(48.52,25.1) 48.97,24.65 C13.2 ; v1(41.47,25.05) U3.P3 ; C24.2 v1(34.37,21.05) ; v1(14.97,21.41) C18.2 ; C32.2 v1(34.37,19.05) ; C19.2 v1(47.47,21.05) ; C57.2 v1(16.75,5.44) ; C49.2 v1(34.37,13.05) ; v1(14.97,13.92) C43.2 ; v1(43.48,31.22) C5.2 v1(41.48,31.22) ; U3.R6 v1(41.47,21.05) ; C36.2 v1(43.47,19.05) ; v1(53.48,6.88) C55.2 v1(51.48,6.88) ; C22.2 v1(49.47,20.05) ; C40.2 v1(52.47,14.05) C45.2 ; C50.2 v1(67.52,8.65) ; C31.2 v1(56.82,19.05) ; C26.2 v1(46.47,20.05) ; C17.2 v1(16.75,20.42) ; C6.2 v1(71.78,20.65) ; C54.2 v1(67.52,29.45) ; C52.2 v1(67.52,23.05) ; C14.2 v1(80.6,6.79) ; C53.2 v1(67.52,27.85) ; C28.2 v1(47.47,19.05) ; C30.2 v1(49.47,19.05) ; v1(59.5,26.05) C10.2 v1(59.5,24.05) R14.2 ; C11.2 v1(34.37,25.05) ; C51.2 v1(67.52,19.05) ; U3.J8 v1(46.47,19.05) ; C9.2 v1(52.47,24.1) ; C46.2 v1(49.47,12.05) ; C58.2 v1(14.97,6.43)
  BOTTOM w0.508: 13.18,42.11 J3.3 J3.4 13.18,36.42 ; 61.44,42.11 J3.41 J3.42 ; J4.20 33.5,-4.09 ; 33.5,42.11 J3.19 J3.20
  vias: v1(13.64,2.57) v1(16.97,42.11) v1(19.48,-3.99) v1(21.92,26.85) v1(22.12,42.09) v1(23.7,24.46) v1(23.9,15.32) v1(23.9,12.67) v1(23.85,8.99) v1(23.88,5.41) v1(27.1,-4.01) v1(27.13,42.04) v1(32.18,42.06) v1(34.85,-3.96) v1(42.37,42.01) v1(42.39,-4.01) v1(48.44,7.31) v1(51.28,-4.11) v1(54.97,42.09) v1(60.15,42.14) v1(78.18,11.1) v1(78.21,6.48) v1(78.38,15.67) v1(78.44,21.13) v1(78.59,27.33) v1(80.44,42.14) v1(81.99,8.43) v1(82.09,2.62)
VCCIO: length 9.4
  TOP w0.406: U3.R13 v1(40.47,14.05) ; v1(46.84,5.11) C3.1 ; U3.D15 v1(52.47,12.05) ; U3.K13 v1(45.47,14.05) ; U3.G13 v1(49.47,14.05) ; U3.J15 v1(46.47,12.05) ; U3.N15 v1(42.47,12.05)
  BOTTOM w0.406: v1(42.47,12.05) 42.92,12.5 C48.1 ; C47.1 v1(45.47,14.05) ; C45.1 v1(52.47,12.05) ; C41.1 40.18,13.76 v1(40.47,14.05) ; C46.1 v1(49.47,14.05)
  vias: v1(37.48,13.05) v1(37.48,12.05) v1(37.48,11.05) v1(41.48,9.05) v1(43.48,9.05) v1(51.48,9.05) v1(53.48,9.05)
A12_L62N_0: length 37.9
  TOP w0.127: J4.57 81.76,-0.98 arc(81.73,-1.07) 81.64,-1.1 81.29,-1.1 arc(80.82,-0.91) 80.62,-0.43 80.62,0.26 80.62,0.26 arc(80.61,0.28) 80.61,0.3 arc(80.49,0.6) 80.3,0.86 79.94,1.21 arc(79.89,1.34) 79.94,1.48 79.95,1.48 arc(80.1,1.85) 79.95,2.22 arc(79.58,2.37) 79.21,2.22 79.21,2.22 arc(79.07,2.16) 78.94,2.22 74.69,6.46 arc(73.35,7.36) 71.77,7.67 66.49,7.67 arc(66.36,7.73) 66.3,7.86 66.3,8.01 arc(66.11,8.2) 65.92,8.01 65.92,7.86 arc(65.87,7.73) 65.73,7.67 64.53,7.67 arc(63.04,7.97) 61.77,8.81 61.59,8.99 arc(61.54,9.13) 61.59,9.26 arc(61.65,9.39) 61.59,9.53 61.59,9.53 arc(61.46,9.59) 61.32,9.53 61.32,9.53 arc(61.19,9.47) 61.06,9.53 59.33,11.25 arc(58.62,12.32) 58.37,13.58 58.37,13.84 arc(58.29,14.23) 58.07,14.55 57.77,14.86 arc(57.21,15.23) 56.54,15.37 55.41,15.37 arc(55.18,15.41) U3.A12
A13_L63N_0: length 37.9
  TOP w0.127: J4.55 79.22,-0.98 arc(79.19,-1.07) 79.1,-1.1 78.36,-1.1 arc(78.27,-1.07) 78.23,-0.98 78.23,1.12 arc(77.98,1.73) 77.37,1.98 arc(77.05,1.85) 76.91,1.52 arc(76.87,1.43) 76.78,1.4 arc(76.51,1.51) 76.4,1.78 76.4,2.65 arc(76.23,3.52) 75.74,4.26 74.22,5.77 arc(73.19,6.46) 71.97,6.71 62.7,6.71 arc(62.08,6.83) 61.55,7.18 59.27,9.46 arc(59.22,9.6) 59.27,9.73 59.36,9.82 arc(59.36,10.09) 59.09,10.09 59,10 arc(58.73,10) 58.73,10.27 58.82,10.36 arc(58.82,10.63) 58.55,10.63 58.46,10.54 arc(58.19,10.54) 58.19,10.81 58.28,10.9 arc(58.28,11.16) 58.01,11.16 57.92,11.08 arc(57.79,11.02) 57.65,11.08 57.18,11.56 arc(57.08,11.7) 57.05,11.86 57.05,13.73 arc(56.86,14.19) 56.4,14.38 55.32,14.38 arc(55.16,14.41) 55.02,14.5 U3.A13
A14_L65N_0: length 37.9
  TOP w0.127: J4.53 76.68,-0.98 arc(76.65,-1.07) 76.56,-1.1 75.69,-1.1 arc(75.6,-1.07) 75.56,-0.98 75.56,1.07 arc(75.41,1.44) 75.04,1.59 74.28,1.59 arc(74.09,1.78) 74.28,1.97 75.04,1.97 arc(75.41,2.12) 75.56,2.49 75.56,2.74 arc(75.48,3.17) 75.24,3.52 73.29,5.47 arc(73.05,5.63) 72.77,5.69 61.27,5.69 arc(61.02,5.74) 60.8,5.88 60.43,6.25 arc(60.37,6.39) 60.43,6.52 60.47,6.56 arc(60.62,6.93) 60.47,7.3 arc(60.1,7.45) 59.73,7.3 59.69,7.26 arc(59.42,7.26) 59.42,7.53 59.46,7.57 arc(59.61,7.94) 59.46,8.31 arc(59.09,8.46) 58.73,8.31 58.69,8.27 arc(58.55,8.21) 58.42,8.27 57.85,8.84 arc(57.8,8.97) 57.85,9.1 57.89,9.15 arc(57.89,9.41) 57.63,9.42 57.58,9.37 arc(57.31,9.37) 57.31,9.64 57.36,9.68 arc(57.36,9.95) 57.09,9.95 57.04,9.91 arc(56.91,9.86) 56.77,9.91 56.39,10.29 arc(56.28,10.47) 56.24,10.67 56.24,12.9 arc(56.1,13.23) 55.78,13.36 55.32,13.36 arc(55.17,13.39) 55.05,13.47 U3.A14
B12_L62P_0: length 37.8
  TOP w0.127: J4.58 81.76,-1.56 arc(81.73,-1.47) 81.64,-1.44 81.29,-1.44 arc(80.58,-1.14) 80.29,-0.43 80.29,0.22 arc(80.2,0.44) 80.06,0.62 79.71,0.98 arc(79.56,1.34) 79.71,1.71 79.72,1.72 arc(79.77,1.85) 79.72,1.99 79.71,1.99 arc(79.58,2.04) 79.45,1.99 79.44,1.98 arc(79.07,1.83) 78.7,1.98 74.46,6.23 arc(73.23,7.05) 71.77,7.34 64.53,7.34 arc(62.91,7.66) 61.54,8.58 59.1,11.02 arc(58.31,12.19) 58.04,13.58 58.04,13.84 arc(57.99,14.1) 57.84,14.32 57.54,14.62 arc(57.08,14.93) 56.54,15.04 55.21,15.04 arc(54.54,15.17) U3.B12
B14_L65P_0: length 37.9
  TOP w0.127: J4.54 76.68,-1.56 arc(76.65,-1.47) 76.56,-1.44 75.69,-1.44 arc(75.37,-1.3) 75.23,-0.98 75.23,1.07 arc(75.18,1.2) 75.04,1.26 74.28,1.26 arc(73.76,1.78) 74.28,2.3 75.04,2.3 arc(75.18,2.35) 75.23,2.49 75.23,2.74 arc(75.18,3.04) 75.01,3.29 73.06,5.24 arc(72.93,5.33) 72.77,5.36 61.27,5.36 arc(60.89,5.43) 60.57,5.65 60.2,6.02 arc(60.04,6.39) 60.2,6.76 60.23,6.8 arc(60.29,6.93) 60.24,7.06 60.23,7.07 arc(60.1,7.12) 59.97,7.07 59.93,7.03 arc(59.19,7.03) 59.19,7.76 59.23,7.8 arc(59.28,7.93) 59.23,8.07 59.23,8.07 arc(59.09,8.13) 58.96,8.07 58.92,8.03 arc(58.55,7.88) 58.18,8.03 56.16,10.06 arc(55.97,10.34) 55.91,10.67 55.91,12.9 arc(55.87,12.99) 55.78,13.03 55.23,13.03 arc(54.55,13.17) U3.B14
B15_L29P_1: length 37.9
  TOP w0.127: J4.50 71.6,-1.56 arc(71.64,-1.47) 71.73,-1.44 72.69,-1.44 arc(73.02,-1.3) 73.15,-0.98 73.15,1.12 arc(73,1.49) 72.63,1.64 72.25,1.64 arc(72.06,1.83) 72.25,2.02 72.63,2.02 arc(73.15,2.54) 72.63,3.06 72.1,3.06 arc(71.91,3.25) 72.1,3.44 72.63,3.44 arc(73,3.59) 73.15,3.96 73.15,4.22 arc(73,4.59) 72.62,4.75 60.65,4.75 arc(60.38,4.8) 60.15,4.96 58.66,6.45 arc(58.29,6.61) 57.92,6.45 57.17,5.7 arc(56.9,5.7) 56.9,5.97 57.65,6.72 arc(57.8,7.09) 57.65,7.46 56.08,9.03 54.64,10.47 arc(54.52,10.64) 54.48,10.85 54.48,11.32 arc(54.35,11.98) U3.B15
B16_L29N_1: length 37.9
  TOP w0.127: U3.B16 54,11.52 arc(54.11,11.35) 54.15,11.15 54.15,10.85 arc(54.22,10.52) 54.41,10.24 54.77,9.87 arc(54.82,9.74) 54.77,9.61 54.76,9.6 arc(54.76,9.33) 55.03,9.33 55.04,9.34 arc(55.31,9.34) 55.31,9.07 55.3,9.06 arc(55.3,8.79) 55.57,8.79 55.58,8.8 arc(55.71,8.85) 55.85,8.8 57.42,7.23 arc(57.47,7.09) 57.42,6.96 56.66,6.2 arc(56.66,5.47) 57.4,5.47 58.15,6.22 arc(58.29,6.27) 58.42,6.22 59.92,4.72 arc(60.26,4.5) 60.65,4.42 72.62,4.42 arc(72.76,4.36) 72.82,4.22 72.82,3.96 arc(72.77,3.83) 72.63,3.77 72.1,3.77 arc(71.58,3.25) 72.1,2.73 72.63,2.73 arc(72.82,2.54) 72.63,2.35 72.25,2.35 arc(71.73,1.83) 72.25,1.31 72.63,1.31 arc(72.77,1.25) 72.82,1.12 72.82,0.84 arc(72.78,0.74) 72.68,0.7 arc(72.55,0.64) 72.49,0.51 arc(72.55,0.37) 72.68,0.32 arc(72.78,0.28) 72.82,0.18 72.82,0.08 arc(72.78,-0.02) 72.68,-0.06 arc(72.58,-0.1) 72.54,-0.2 72.54,-0.3 arc(72.58,-0.4) 72.68,-0.44 arc(72.78,-0.49) 72.82,-0.58 72.82,-0.98 arc(72.78,-1.07) 72.69,-1.1 71.73,-1.1 arc(71.64,-1.07) 71.6,-0.98 J4.49
C13_L63P_0: length 37.9
  TOP w0.127: J4.56 79.22,-1.56 arc(79.19,-1.47) 79.1,-1.44 78.36,-1.44 arc(78.04,-1.3) 77.9,-0.98 77.9,1.12 arc(77.75,1.5) 77.37,1.65 arc(77.28,1.61) 77.24,1.52 arc(77.11,1.2) 76.78,1.07 arc(76.28,1.28) 76.07,1.78 76.07,2.65 76.07,2.65 arc(75.93,3.39) 75.5,4.02 73.99,5.54 arc(73.06,6.16) 71.97,6.38 62.7,6.38 arc(61.95,6.52) 61.32,6.95 59.04,9.23 56.94,11.32 arc(56.78,11.57) 56.72,11.86 56.72,13.73 arc(56.63,13.95) 56.4,14.05 54.19,14.05 arc(53.53,14.18) U3.C13
C15_L33P_1: length 37.8
  TOP w0.127: J4.48 69.06,-1.56 arc(69.1,-1.47) 69.19,-1.44 70.15,-1.44 arc(70.48,-1.3) 70.61,-0.98 70.61,1.68 arc(70.46,2.04) 70.09,2.2 69,2.2 arc(68.81,2.39) 69,2.58 70.09,2.58 arc(70.46,2.73) 70.61,3.1 70.61,3.35 arc(70.48,3.68) 70.15,3.81 59.44,3.81 arc(59.3,3.87) 59.25,4 59.25,4.36 arc(58.72,4.88) 58.2,4.36 58.2,4 arc(58.01,3.81) 57.82,4 57.82,4.36 arc(57.3,4.88) 56.78,4.36 56.78,4 arc(56.73,3.87) 56.59,3.81 56.34,3.81 arc(56.18,3.88) 56.11,4.04 56.11,7.32 arc(56.07,7.51) 55.96,7.68 53.6,10.04 arc(53.5,10.18) 53.47,10.36 53.47,11.36 arc(53.34,12) U3.C15
C16_L33N_1: length 37.8
  TOP w0.127: J4.47 69.06,-0.98 arc(69.1,-1.07) 69.19,-1.1 70.15,-1.1 arc(70.24,-1.07) 70.28,-0.98 70.28,0.6 arc(70.23,0.73) 70.09,0.79 69.96,0.79 arc(69.77,0.98) 69.96,1.17 70.09,1.17 arc(70.23,1.22) 70.28,1.36 70.28,1.68 arc(70.23,1.81) 70.09,1.87 69,1.87 arc(68.48,2.39) 69,2.91 70.09,2.91 arc(70.23,2.96) 70.28,3.1 70.28,3.35 arc(70.24,3.44) 70.15,3.48 59.44,3.48 arc(59.07,3.63) 58.92,4 58.92,4.36 arc(58.72,4.55) 58.53,4.36 58.53,4 arc(58.01,3.48) 57.49,4 57.49,4.36 arc(57.3,4.55) 57.11,4.36 57.11,4 arc(56.96,3.63) 56.59,3.48 56.34,3.48 arc(55.94,3.64) 55.78,4.04 55.78,7.32 arc(55.77,7.39) 55.73,7.44 54.76,8.41 arc(54.63,8.46) 54.49,8.41 54.32,8.23 arc(54.05,8.23) 54.05,8.5 54.22,8.68 arc(54.28,8.81) 54.22,8.95 53.37,9.8 arc(53.2,10.06) 53.14,10.36 53.14,11.18 arc(53.1,11.37) 52.99,11.53 U3.C16
D11_L66P_0: length 37.9
  TOP w0.147: U3.D11 v1(52.47,16.05)
  BOTTOM w0.127: J4.52 74.14,-1.56 arc(74.18,-1.47) 74.27,-1.44 74.93,-1.44 arc(75.38,-1.25) 75.56,-0.8 75.56,2.7 arc(75.42,3.05) 75.06,3.2 65.82,3.2 arc(65.48,3.27) 65.2,3.45 59.57,9.09 arc(59.51,9.23) 59.57,9.36 59.85,9.64 arc(60,10.01) 59.85,10.38 arc(59.48,10.53) 59.11,10.38 58.83,10.1 arc(58.69,10.04) 58.56,10.1 56.65,12.01 arc(56.44,12.32) 56.36,12.69 56.36,12.87 arc(56.24,13.47) 55.9,13.99 54.26,15.63 arc(54.01,15.79) 53.72,15.85 52.96,15.85 arc(52.69,15.9) v1(52.47,16.05)
D12_L66N_0: length 37.9
  TOP w0.147: U3.D12 v1(51.47,16.05)
  BOTTOM w0.127: J4.51 74.14,-0.98 arc(74.18,-1.07) 74.27,-1.1 74.93,-1.1 arc(75.15,-1.02) 75.23,-0.8 75.23,2.7 arc(75.18,2.82) 75.06,2.87 65.82,2.87 arc(65.36,2.96) 64.97,3.22 59.33,8.86 arc(59.18,9.23) 59.33,9.59 59.62,9.88 arc(59.67,10.01) 59.62,10.15 59.62,10.15 arc(59.48,10.2) 59.35,10.15 59.06,9.86 arc(58.69,9.71) 58.33,9.86 56.41,11.78 arc(56.13,12.2) 56.03,12.69 56.03,12.87 arc(55.94,13.35) 55.66,13.75 54.03,15.39 arc(53.89,15.49) 53.72,15.52 52.75,15.52 arc(52.06,15.66) v1(51.47,16.05)
D14_L31P_1: length 37.9
  TOP w0.147: U3.D14 v1(52.47,13.05)
  BOTTOM w0.127: v1(52.47,13.05) 52.24,12.82 arc(52.1,12.61) 52.05,12.37 52.05,11.91 arc(52.16,11.66) 52.41,11.56 54.08,11.56 arc(54.44,11.41) 54.58,11.05 54.58,10.59 arc(54.59,10.55) 54.62,10.5 56.81,8.31 arc(56.91,8.16) 56.95,7.99 56.95,7.39 arc(56.81,7.06) 56.49,6.93 55.74,6.93 arc(55.55,6.74) 55.74,6.55 57.17,6.55 arc(57.69,6.03) 57.17,5.51 55.74,5.51 arc(55.55,5.32) 55.74,5.13 57.34,5.13 arc(57.86,4.6) 57.34,4.08 55.74,4.08 arc(55.55,3.89) 55.74,3.7 57.34,3.7 arc(57.86,3.18) 57.34,2.66 55.74,2.66 arc(55.55,2.47) 55.74,2.28 57.47,2.28 arc(57.99,1.76) 57.47,1.24 55.44,1.24 arc(55.3,1.18) 55.24,1.05 55.24,-0.51 arc(54.97,-1.16) 54.32,-1.44 53.95,-1.44 arc(53.86,-1.47) 53.82,-1.56 J4.36
D16_L31N_1: length 37.9
  TOP w0.147: U3.D16 v1(52.47,11.05)
  BOTTOM w0.127: v1(52.47,11.05) 52.54,11.12 arc(52.59,11.16) 52.64,11.19 arc(52.64,11.19) 52.65,11.19 arc(52.72,11.22) 52.81,11.23 53.06,11.23 arc(53.2,11.17) 53.25,11.04 53.25,10.55 arc(53.44,10.36) 53.63,10.55 53.63,11.04 arc(53.69,11.17) 53.82,11.23 54.08,11.23 arc(54.2,11.17) 54.25,11.05 54.25,10.59 arc(54.29,10.42) 54.39,10.27 55.85,8.81 arc(55.9,8.68) 55.85,8.54 55.46,8.16 arc(55.46,7.89) 55.73,7.89 56.12,8.27 arc(56.25,8.33) 56.39,8.27 56.58,8.08 arc(56.61,8.04) 56.62,7.99 56.62,7.39 arc(56.58,7.3) 56.49,7.26 55.74,7.26 arc(55.22,6.74) 55.74,6.22 57.17,6.22 arc(57.36,6.03) 57.17,5.84 55.74,5.84 arc(55.22,5.32) 55.74,4.8 57.34,4.8 arc(57.53,4.6) 57.34,4.41 55.74,4.41 arc(55.22,3.89) 55.74,3.37 57.34,3.37 arc(57.53,3.18) 57.34,2.99 55.74,2.99 arc(55.22,2.47) 55.74,1.95 57.47,1.95 arc(57.66,1.76) 57.47,1.57 55.44,1.57 arc(55.07,1.42) 54.91,1.05 54.91,-0.51 arc(54.74,-0.93) 54.32,-1.1 53.95,-1.1 arc(53.86,-1.07) 53.82,-0.98 J4.35
DONE_2: length 50.5
  TOP w0.147: U3.P13 v1(41.47,15.05)
  BOTTOM w0.147: J3.6 15.72,36.77 arc(15.79,36.45) 15.96,36.18 17.35,34.8 arc(17.57,34.65) 17.84,34.6 23.58,34.6 arc(24.06,34.5) 24.47,34.23 26.97,31.72 arc(27.11,31.53) 27.15,31.3 R13.1 27.15,28.95 arc(27.11,28.72) 26.97,28.52 26.72,28.27 arc(26.59,28.07) 26.54,27.84 26.54,25.55 arc(26.46,25.13) 26.23,24.78 23.86,22.42 arc(23.7,22.18) 23.65,21.9 23.65,17.38 arc(23.7,17.11) 23.85,16.89 25.97,14.77 arc(26.35,14.52) 26.8,14.43 38.31,14.43 arc(38.5,14.47) 38.67,14.57 39.01,14.92 arc(39.16,15.02) 39.33,15.05 v1(41.47,15.05)
E1_L46N_3: length 37.2
  TOP w0.127: J3.57 81.76,39.66 arc(81.73,39.57) 81.64,39.54 81.53,39.54 arc(81.14,39.46) 80.8,39.24 80.64,39.07 arc(80.42,38.74) 80.34,38.35 80.34,38.23 arc(80.27,37.88) 80.07,37.59 78.85,36.36 arc(78.49,36.13) 78.08,36.04 77.72,36.04 arc(76.87,35.87) 76.15,35.39 74.81,34.05 arc(72.15,32.27) 69,31.65 64.09,31.65 arc(63.96,31.7) 63.9,31.84 63.9,31.86 arc(63.71,32.06) 63.52,31.86 63.52,31.84 arc(63.47,31.7) 63.33,31.65 62.44,31.65 arc(59.94,31.15) 57.82,29.73 57.29,29.21 arc(55.77,28.2) 53.98,27.84 52.56,27.84 arc(52.01,27.73) 51.55,27.42 51.18,27.05 arc(51.03,26.82) U3.E1
E2_L46P_3: length 37.3
  TOP w0.127: J3.58 81.76,39.08 arc(81.73,39.17) 81.64,39.2 81.53,39.2 arc(81.26,39.15) 81.04,39 80.87,38.84 arc(80.72,38.61) 80.67,38.35 80.67,38.23 arc(80.58,37.76) 80.31,37.36 79.08,36.13 arc(78.62,35.82) 78.08,35.71 77.72,35.71 arc(77,35.57) 76.38,35.16 75.04,33.82 arc(72.27,31.97) 69,31.32 62.44,31.32 arc(60.06,30.85) 58.05,29.5 57.53,28.98 arc(55.9,27.89) 53.98,27.51 52.56,27.51 arc(52.14,27.42) 51.78,27.19 51.64,27.04 51.61,27.01 arc(51.52,26.86) 51.49,26.7 51.49,26.31 arc(51.44,26.08) 51.31,25.89 U3.E2
E3_L54N_3: length 37.2
  TOP w0.147: U3.E3 v1(51.47,25.05)
  BOTTOM w0.127: v1(51.47,25.05) 51.58,25.15 arc(51.6,25.19) 51.61,25.24 51.61,25.71 arc(51.58,25.8) 51.49,25.83 51.42,25.83 arc(51.23,26.02) 51.42,26.21 51.49,26.21 arc(51.58,26.25) 51.61,26.34 51.61,27.67 arc(51.81,28.15) 52.29,28.35 53.42,28.35 arc(53.62,28.39) 53.79,28.5 55.54,30.25 arc(55.85,30.46) 56.22,30.53 70.2,30.53 arc(70.67,30.62) 71.06,30.89 74.98,34.81 arc(75.17,35.09) 75.23,35.42 75.23,39 arc(75.39,39.38) 75.77,39.54 76.56,39.54 arc(76.65,39.57) 76.68,39.66 J3.53
E4_L54P_3: length 37.3
  TOP w0.147: U3.E4 v1(51.47,24.05)
  BOTTOM w0.127: J3.54 76.68,39.08 arc(76.65,39.17) 76.56,39.2 75.77,39.2 arc(75.62,39.15) 75.56,39 75.56,35.42 arc(75.47,34.96) 75.22,34.58 71.29,30.65 arc(70.79,30.32) 70.2,30.2 56.22,30.2 arc(55.98,30.15) 55.77,30.01 54.02,28.27 arc(53.75,28.08) 53.42,28.02 52.29,28.02 arc(52.04,27.92) 51.94,27.67 51.94,25.19 arc(51.82,24.57) v1(51.47,24.05)
E15_L34P_1: length 37.9
  TOP w0.127: J4.46 66.52,-1.56 arc(66.56,-1.47) 66.65,-1.44 67.64,-1.44 arc(67.96,-1.3) 68.1,-0.98 68.1,2.51 arc(67.94,2.89) 67.56,3.05 67.31,3.05 arc(66.94,2.9) 66.79,2.53 66.79,2.1 arc(66.74,1.97) 66.61,1.91 arc(66.47,1.97) 66.41,2.11 66.41,2.53 arc(65.89,3.05) 65.37,2.53 65.37,2.27 arc(65.31,2.14) 65.18,2.08 65.14,2.08 arc(65.03,2.13) 64.99,2.24 64.99,2.53 arc(64.47,3.05) 63.94,2.53 63.94,2.27 arc(63.89,2.14) 63.75,2.08 63.72,2.08 arc(63.61,2.13) 63.56,2.24 63.56,2.53 arc(63.04,3.05) 62.52,2.53 62.52,2.27 arc(62.47,2.14) 62.33,2.08 62.29,2.08 arc(62.19,2.13) 62.14,2.24 62.14,2.53 arc(61.62,3.05) 61.1,2.53 61.1,2.15 arc(61.05,2.02) 60.92,1.96 60.92,1.96 arc(60.78,2.02) 60.72,2.16 60.72,2.53 arc(60.57,2.9) 60.2,3.05 55.35,3.05 arc(55.26,3.09) 55.22,3.18 55.22,6.14 arc(55.15,6.51) 54.94,6.82 52.97,8.79 51.57,10.19 arc(51.49,10.31) 51.46,10.45 51.46,11.37 arc(51.33,12.01) U3.E15
E16_L34N_1: length 37.9
  TOP w0.127: J4.45 66.52,-0.98 arc(66.56,-1.07) 66.65,-1.1 67.64,-1.1 arc(67.73,-1.07) 67.77,-0.98 67.77,0.54 arc(67.71,0.67) 67.58,0.73 67.42,0.73 arc(67.23,0.92) 67.42,1.11 67.58,1.11 arc(67.71,1.16) 67.77,1.3 67.77,2.51 arc(67.71,2.66) 67.56,2.72 67.31,2.72 arc(67.18,2.66) 67.12,2.53 67.12,2.1 arc(66.97,1.73) 66.61,1.58 arc(66.23,1.74) 66.08,2.11 66.08,2.53 arc(65.89,2.72) 65.7,2.53 65.7,2.27 arc(65.54,1.91) 65.18,1.75 65.14,1.75 arc(64.8,1.89) 64.66,2.24 64.66,2.53 arc(64.47,2.72) 64.27,2.53 64.27,2.27 arc(64.12,1.91) 63.75,1.75 63.72,1.75 arc(63.37,1.89) 63.23,2.24 63.23,2.53 arc(63.04,2.72) 62.85,2.53 62.85,2.27 arc(62.7,1.91) 62.33,1.75 62.29,1.75 arc(61.95,1.89) 61.81,2.24 61.81,2.53 arc(61.62,2.72) 61.43,2.53 61.43,2.15 arc(61.28,1.78) 60.92,1.63 60.92,1.63 arc(60.54,1.79) 60.39,2.16 60.39,2.53 arc(60.33,2.66) 60.2,2.72 55.35,2.72 arc(55.02,2.85) 54.89,3.18 54.89,6.14 arc(54.84,6.38) 54.7,6.59 52.74,8.55 arc(52.6,8.61) 52.47,8.55 52.32,8.4 arc(52.05,8.4) 52.05,8.67 52.2,8.82 arc(52.25,8.96) 52.2,9.09 51.33,9.96 arc(51.18,10.18) 51.13,10.45 51.13,11.17 arc(51.09,11.38) U3.E16
F1_L41N_GCLK26_3: length 37.2
  TOP w0.127: J3.55 79.22,39.66 arc(79.19,39.57) 79.1,39.54 76.48,39.54 arc(75.62,39.18) 75.26,38.31 75.26,37.69 arc(75.14,37.09) 74.8,36.59 74.62,36.4 arc(74.48,36.34) 74.35,36.4 arc(73.98,36.55) 73.61,36.4 arc(73.46,36.03) 73.61,35.66 arc(73.66,35.53) 73.61,35.39 72.71,34.49 arc(70.66,33.12) 68.24,32.64 62.9,32.64 arc(59.76,32.01) 57.1,30.23 56.57,29.71 arc(55.34,28.89) 53.89,28.6 52.66,28.6 arc(51.73,28.42) 50.95,27.89 50.76,27.71 arc(50.63,27.65) 50.5,27.71 50.45,27.76 arc(50.18,27.76) 50.18,27.49 50.23,27.44 arc(50.29,27.31) 50.23,27.18 arc(50.04,26.89) U3.F1
F2_L41P_GCLK27_3: length 37.2
  TOP w0.127: J3.56 79.22,39.08 arc(79.19,39.17) 79.1,39.2 76.48,39.2 arc(75.85,38.94) 75.59,38.31 75.59,37.69 arc(75.45,36.97) 75.04,36.35 74.85,36.16 arc(74.48,36.01) 74.11,36.16 arc(73.98,36.22) 73.84,36.16 arc(73.79,36.03) 73.84,35.89 arc(73.99,35.53) 73.84,35.16 72.94,34.26 72.94,34.26 arc(70.78,32.82) 68.24,32.31 62.9,32.31 arc(59.89,31.71) 57.33,30 56.81,29.48 arc(55.47,28.58) 53.89,28.27 52.66,28.27 arc(51.86,28.11) 51.18,27.66 50.65,27.12 arc(50.52,26.93) 50.47,26.7 50.47,26.34 arc(50.42,26.07) 50.26,25.84 U3.F2
F3_L53N_3: length 37.3
  TOP w0.147: U3.F3 v1(50.47,25.05)
  BOTTOM w0.127: J3.51 74.14,39.66 arc(74.11,39.57) 74.02,39.54 73.44,39.54 arc(72.91,39.32) 72.69,38.79 72.69,36.67 arc(72.57,36.05) 72.23,35.53 69.55,32.86 arc(69.11,32.57) 68.59,32.46 51.72,32.46 arc(51.48,32.41) 51.28,32.28 50.78,31.78 arc(50.68,31.63) 50.65,31.46 50.65,27.42 arc(50.61,27.33) 50.52,27.3 50.43,27.3 arc(50.24,27.11) 50.43,26.92 50.52,26.92 arc(50.61,26.88) 50.65,26.79 50.65,25.47 arc(50.6,25.24) v1(50.47,25.05)
F4_L53P_3: length 37.3
  TOP w0.147: U3.F4 v1(50.47,24.05)
  BOTTOM w0.127: J3.52 74.14,39.08 arc(74.11,39.17) 74.02,39.2 73.44,39.2 arc(73.15,39.08) 73.03,38.79 73.03,36.67 arc(72.88,35.93) 72.46,35.3 69.79,32.63 arc(69.24,32.26) 68.59,32.13 51.72,32.13 arc(51.61,32.11) 51.51,32.04 51.02,31.55 arc(50.99,31.51) 50.98,31.46 50.98,25.27 arc(50.85,24.61) v1(50.47,24.05)
F5_L55N_3: length 37.2
  TOP w0.147: U3.F5 v1(50.47,23.05)
  BOTTOM w0.127: v1(50.47,23.05) 50.37,23.15 arc(50.32,23.22) 50.29,23.31 50.29,23.43 arc(50.27,23.53) 50.22,23.62 arc(50.21,23.63) 50.2,23.65 arc(50.19,23.65) 50.18,23.66 arc(50.18,23.67) 50.17,23.67 arc(50.17,23.68) 50.17,23.68 50.07,23.78 arc(50.01,23.87) 49.99,23.98 49.99,25.57 arc(50.02,25.66) 50.11,25.7 50.2,25.7 arc(50.39,25.89) 50.2,26.08 50.11,26.08 arc(50.02,26.12) 49.99,26.21 49.99,31.52 arc(50,31.57) 50.02,31.61 51.3,32.88 arc(51.34,32.91) 51.39,32.92 65.76,32.92 arc(66.07,32.98) 66.33,33.15 67.7,34.52 arc(67.88,34.8) 67.94,35.12 67.94,35.45 arc(67.79,35.82) 67.42,35.97 67.3,35.97 arc(67.11,36.16) 67.3,36.36 67.42,36.36 arc(67.79,36.51) 67.94,36.88 67.94,39.01 arc(67.79,39.38) 67.42,39.54 66.65,39.54 arc(66.56,39.57) 66.52,39.66 J3.45
F6_L55P_3: length 37.3
  TOP w0.147: U3.F6 v1(50.47,22.05)
  BOTTOM w0.127: v1(50.47,22.05) 50.08,22.44 arc(49.99,22.57) 49.96,22.73 49.96,23.37 arc(49.95,23.41) 49.92,23.46 49.83,23.55 arc(49.7,23.74) 49.66,23.97 49.66,31.52 arc(49.69,31.7) 49.79,31.84 51.06,33.11 arc(51.21,33.21) 51.39,33.25 65.76,33.25 arc(65.94,33.28) 66.09,33.39 67.46,34.76 arc(67.58,34.93) 67.61,35.12 67.61,35.45 arc(67.56,35.59) 67.42,35.64 67.3,35.64 arc(66.78,36.16) 67.3,36.69 67.42,36.69 arc(67.56,36.74) 67.61,36.88 67.61,39.01 arc(67.56,39.15) 67.42,39.2 66.65,39.2 arc(66.56,39.17) 66.52,39.08 J3.46
F10_KEY_0: length 35.7
  TOP w0.147: U3.F10 v1(50.47,17.05)
  TOP w0.406: S1.1 v1(77.58,4.42)
  BOTTOM w0.147: R21.2 v1(77.58,4.42) 68.44,4.42 arc(67.98,4.51) 67.59,4.78 60.72,11.65 arc(60.5,11.97) 60.43,12.35 60.43,13.61 arc(60.37,13.87) 60.22,14.1 59.66,14.66 arc(59.45,14.8) 59.2,14.85 56.46,14.85 arc(56.19,14.9) 55.97,15.05 54.72,16.29 arc(54.49,16.45) 54.2,16.51 51.41,16.51 arc(51.04,16.58) 50.73,16.79 v1(50.47,17.05)
F13_L32P_1: length 37.9
  TOP w0.147: U3.F13 v1(50.47,14.05)
  BOTTOM w0.127: J4.32 48.74,-1.56 arc(48.78,-1.47) 48.87,-1.44 49.81,-1.44 arc(50.13,-1.3) 50.27,-0.98 50.27,1.78 arc(50.3,1.87) 50.39,1.91 52.83,1.91 arc(53.35,2.43) 52.83,2.95 50.41,2.95 arc(50.22,3.14) 50.41,3.33 53.35,3.33 arc(53.87,3.85) 53.35,4.37 50.41,4.37 arc(50.22,4.56) 50.41,4.75 53.36,4.75 arc(53.88,5.27) 53.36,5.79 50.44,5.79 arc(50.3,5.85) 50.24,6 50.24,6.31 arc(50.28,6.51) 50.39,6.68 50.67,6.96 arc(50.86,7.24) 50.93,7.58 50.93,12.94 arc(50.81,13.54) v1(50.47,14.05)
F14_L32N_1: length 37.9
  TOP w0.147: U3.F14 v1(50.47,13.05)
  BOTTOM w0.127: J4.31 48.74,-0.98 arc(48.78,-1.07) 48.87,-1.1 49.81,-1.1 arc(49.9,-1.07) 49.94,-0.98 49.94,1.78 arc(50.07,2.1) 50.39,2.24 52.83,2.24 arc(53.02,2.43) 52.83,2.62 50.41,2.62 arc(49.89,3.14) 50.41,3.66 53.35,3.66 arc(53.54,3.85) 53.35,4.04 50.41,4.04 arc(49.89,4.56) 50.41,5.08 53.36,5.08 arc(53.55,5.27) 53.36,5.46 50.44,5.46 arc(50.07,5.62) 49.91,6 49.91,6.31 arc(49.98,6.64) 50.16,6.91 50.44,7.19 arc(50.56,7.37) 50.6,7.58 50.6,10.54 arc(50.55,10.67) 50.41,10.73 50.3,10.73 arc(50.11,10.92) 50.3,11.11 50.41,11.11 arc(50.6,11.3) 50.41,11.49 50.18,11.49 arc(49.98,11.68) 50.18,11.87 50.41,11.87 arc(50.55,11.93) 50.6,12.06 50.6,12.74 arc(50.57,12.91) v1(50.47,13.05)
F15_L35P_1: length 37.9
  TOP w0.127: J4.44 63.98,-1.56 arc(64.02,-1.47) 64.11,-1.44 65.13,-1.44 arc(65.45,-1.3) 65.58,-0.98 65.58,0.89 arc(65.45,1.21) 65.13,1.35 62.99,1.35 arc(62.67,1.21) 62.53,0.89 62.53,-3.5 arc(62.5,-3.59) 62.41,-3.63 60.4,-3.63 arc(60.31,-3.59) 60.27,-3.5 60.27,0.49 arc(59.79,1.65) 58.63,2.13 54.85,2.13 arc(54.48,2.28) 54.33,2.65 54.33,4.71 arc(54.24,5.18) 53.97,5.57 50.6,8.95 arc(50.5,9.09) 50.47,9.26 50.47,11.35 arc(50.34,12) U3.F15
F16_L35N_1: length 37.9
  TOP w0.127: J4.43 63.98,-0.98 arc(64.02,-1.07) 64.11,-1.1 65.13,-1.1 arc(65.22,-1.07) 65.25,-0.98 65.25,0.89 arc(65.22,0.98) 65.13,1.02 62.99,1.02 arc(62.9,0.98) 62.87,0.89 62.87,-0.89 arc(62.92,-1.03) 63.06,-1.08 63.16,-1.08 arc(63.35,-1.27) 63.16,-1.46 63.06,-1.46 arc(62.92,-1.52) 62.87,-1.65 62.87,-3.5 arc(62.73,-3.83) 62.41,-3.96 60.4,-3.96 arc(60.08,-3.83) 59.94,-3.5 59.94,0.49 arc(59.56,1.42) 58.63,1.8 54.85,1.8 arc(54.25,2.05) 54,2.65 54,4.71 arc(53.93,5.05) 53.74,5.34 50.37,8.71 arc(50.2,8.97) 50.14,9.26 50.14,9.88 arc(50.08,10.01) 49.95,10.07 49.67,10.07 arc(49.48,10.26) 49.67,10.45 49.95,10.45 arc(50.08,10.5) 50.14,10.64 50.14,11.2 arc(50.11,11.37) 50.01,11.51 U3.F16
FPGA_TCK: length 60.9
  TOP w0.147: U3.C14 v1(53.47,13.05)
  BOTTOM w0.147: v1(53.47,13.05) 54.18,13.05 arc(54.37,13.01) 54.53,12.9 54.84,12.6 arc(54.95,12.43) 54.99,12.23 54.99,10.98 arc(55.02,10.83) 55.11,10.71 64.3,1.51 arc(64.74,1.22) 65.25,1.12 69.7,1.12 arc(70,0.99) 70.13,0.69 70.13,-3.12 arc(70.33,-3.61) 70.82,-3.81 79.98,-3.81 arc(80.54,-3.58) 80.77,-3.02 80.77,0.67 arc(80.81,0.85) 80.91,1 81.28,1.37 arc(81.36,1.48) 81.38,1.62 81.38,4.85 arc(81.35,5.02) 81.25,5.16 79.79,6.62 arc(79.65,6.83) 79.6,7.08 79.6,12.15 arc(79.63,12.28) 79.71,12.4 79.96,12.65 arc(80.07,12.72) 80.2,12.75 81.05,12.75 arc(81.37,12.88) 81.5,13.2 81.5,15.35 arc(81.44,15.64) 81.28,15.88 J2.6
